# Altium PCB etapa_1_v2.PcbDoc (part 1 of 2)
Units mil, origin at the board's own origin, x right, y up, seen from the top; angles counter-clockwise.
Board outline 2047.24 x 2047.24 mil, 6 copper layers (Top Layer, Pot_Gnd, X, Y, Ground, Bottom Layer); 286 components, 155 nets, 796 pads, 177 vias.
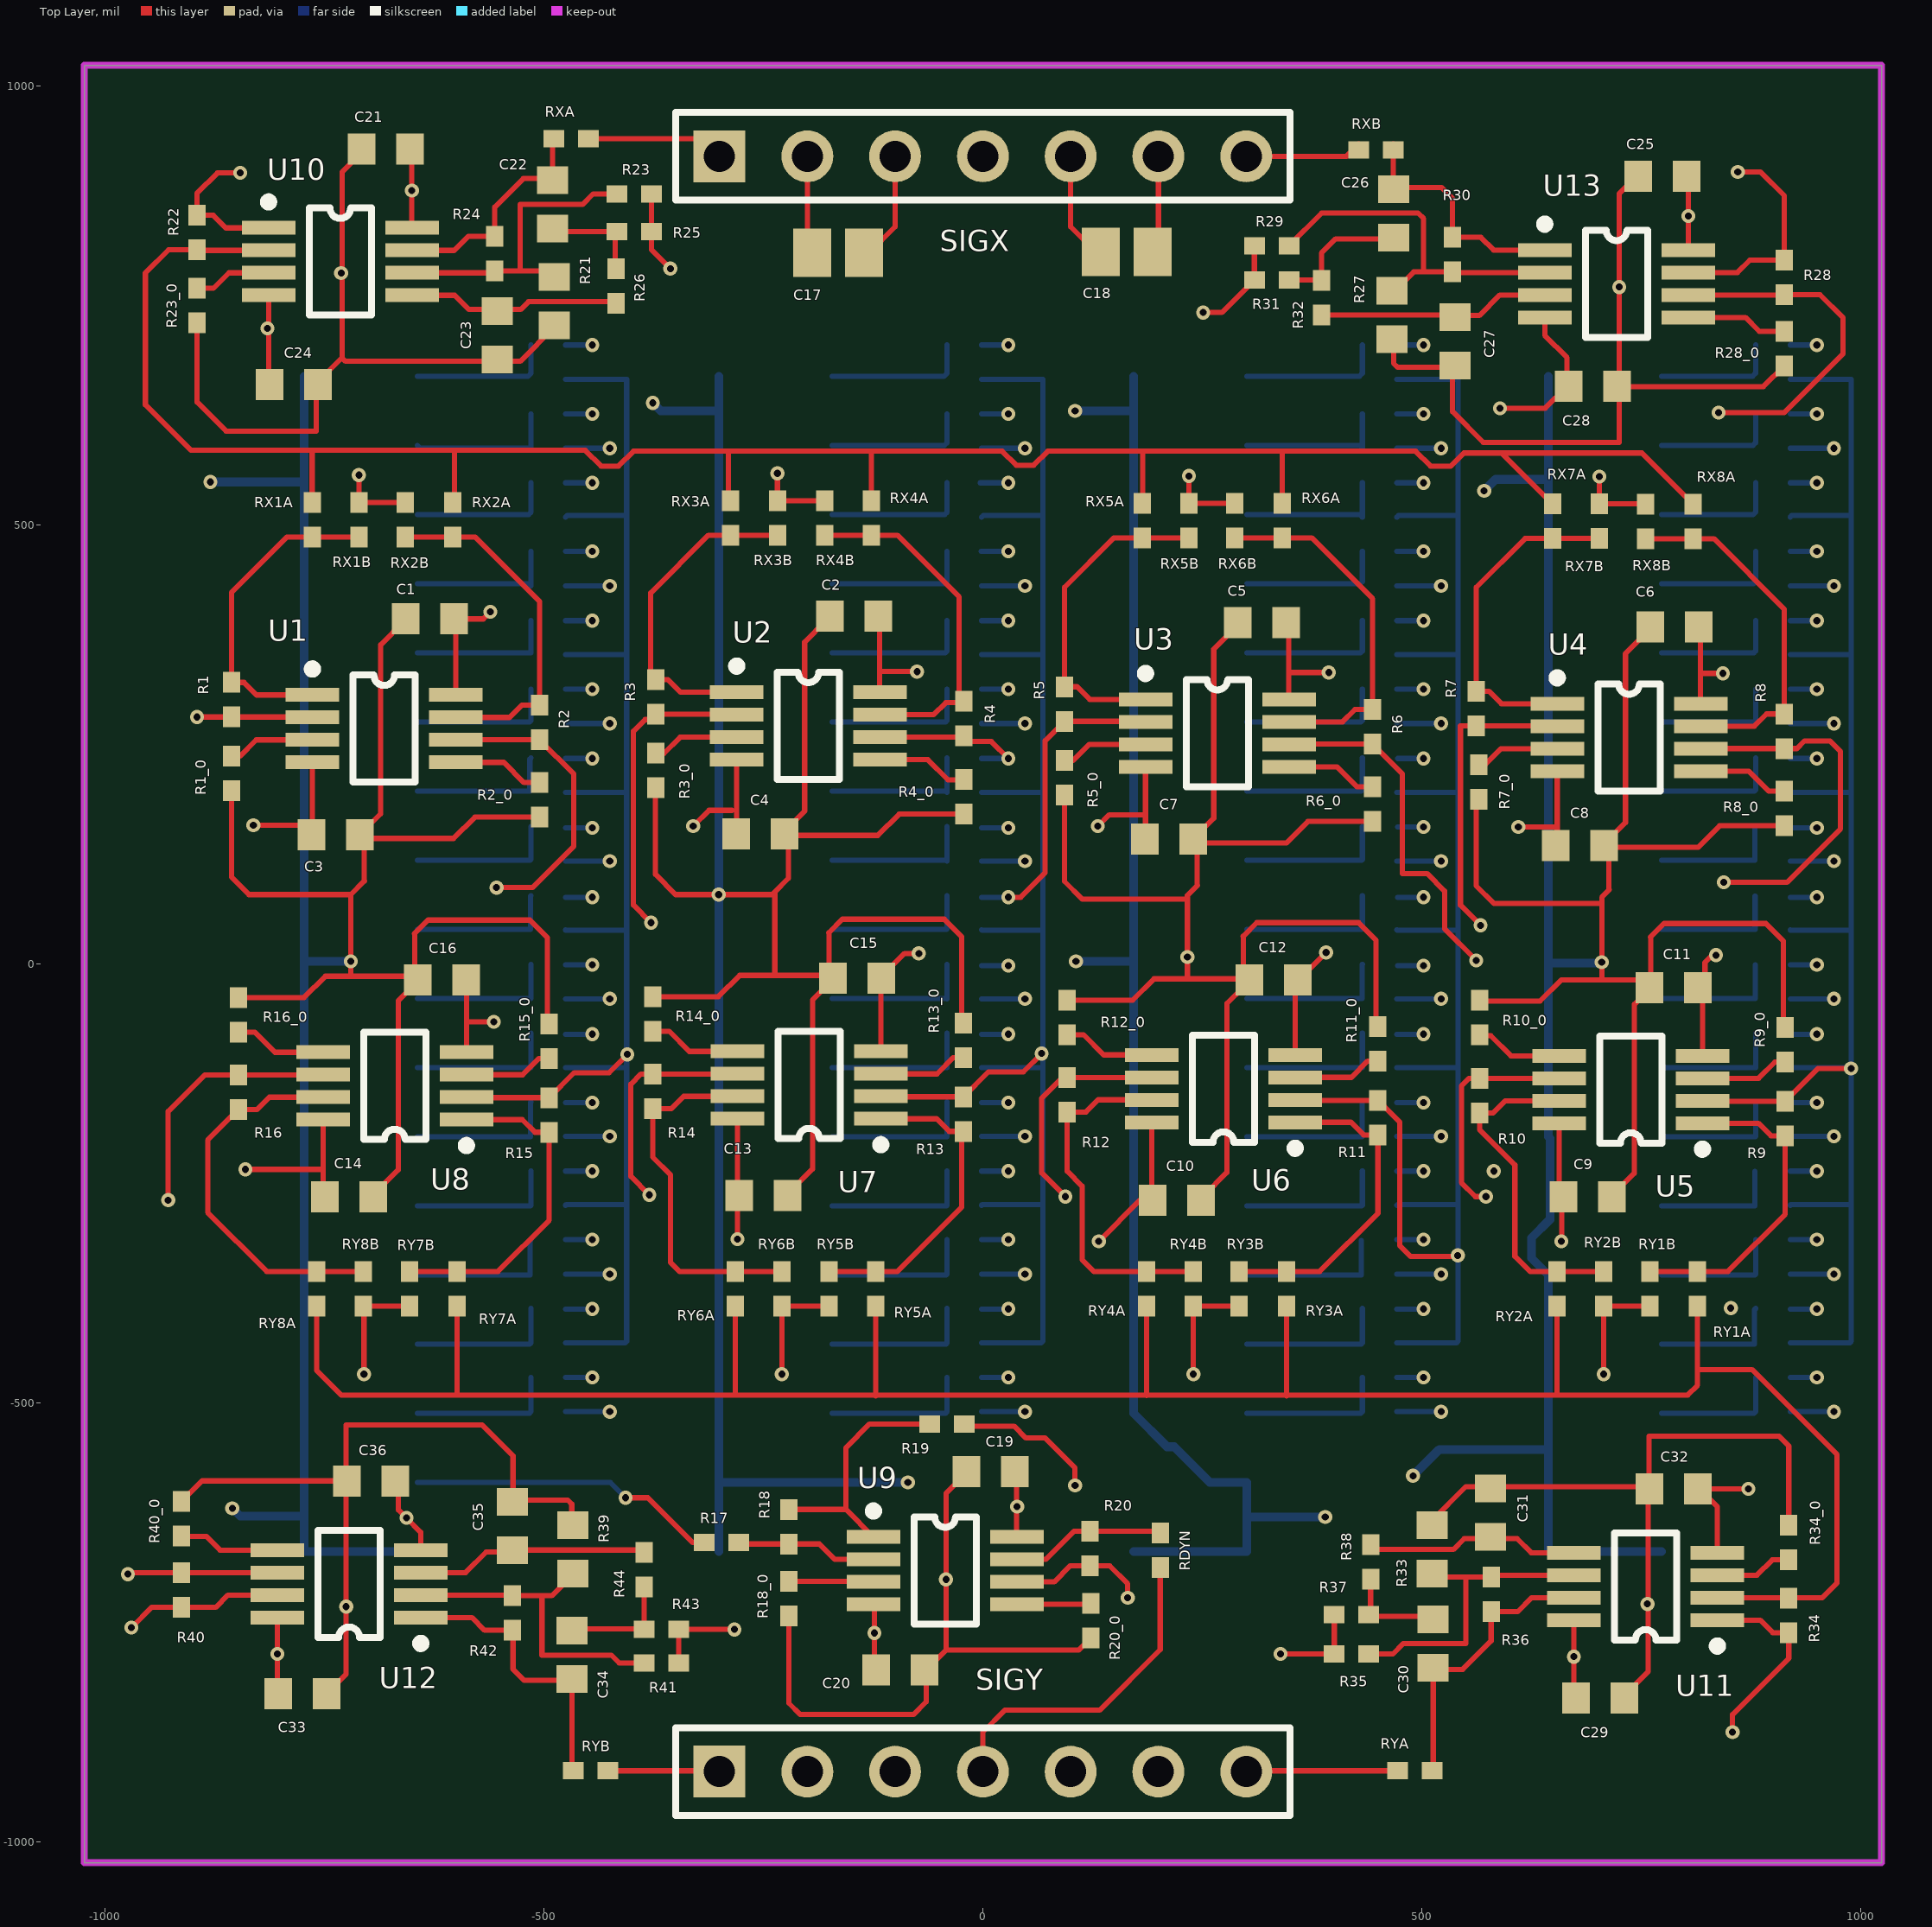
[diagram p0: Top Layer view]
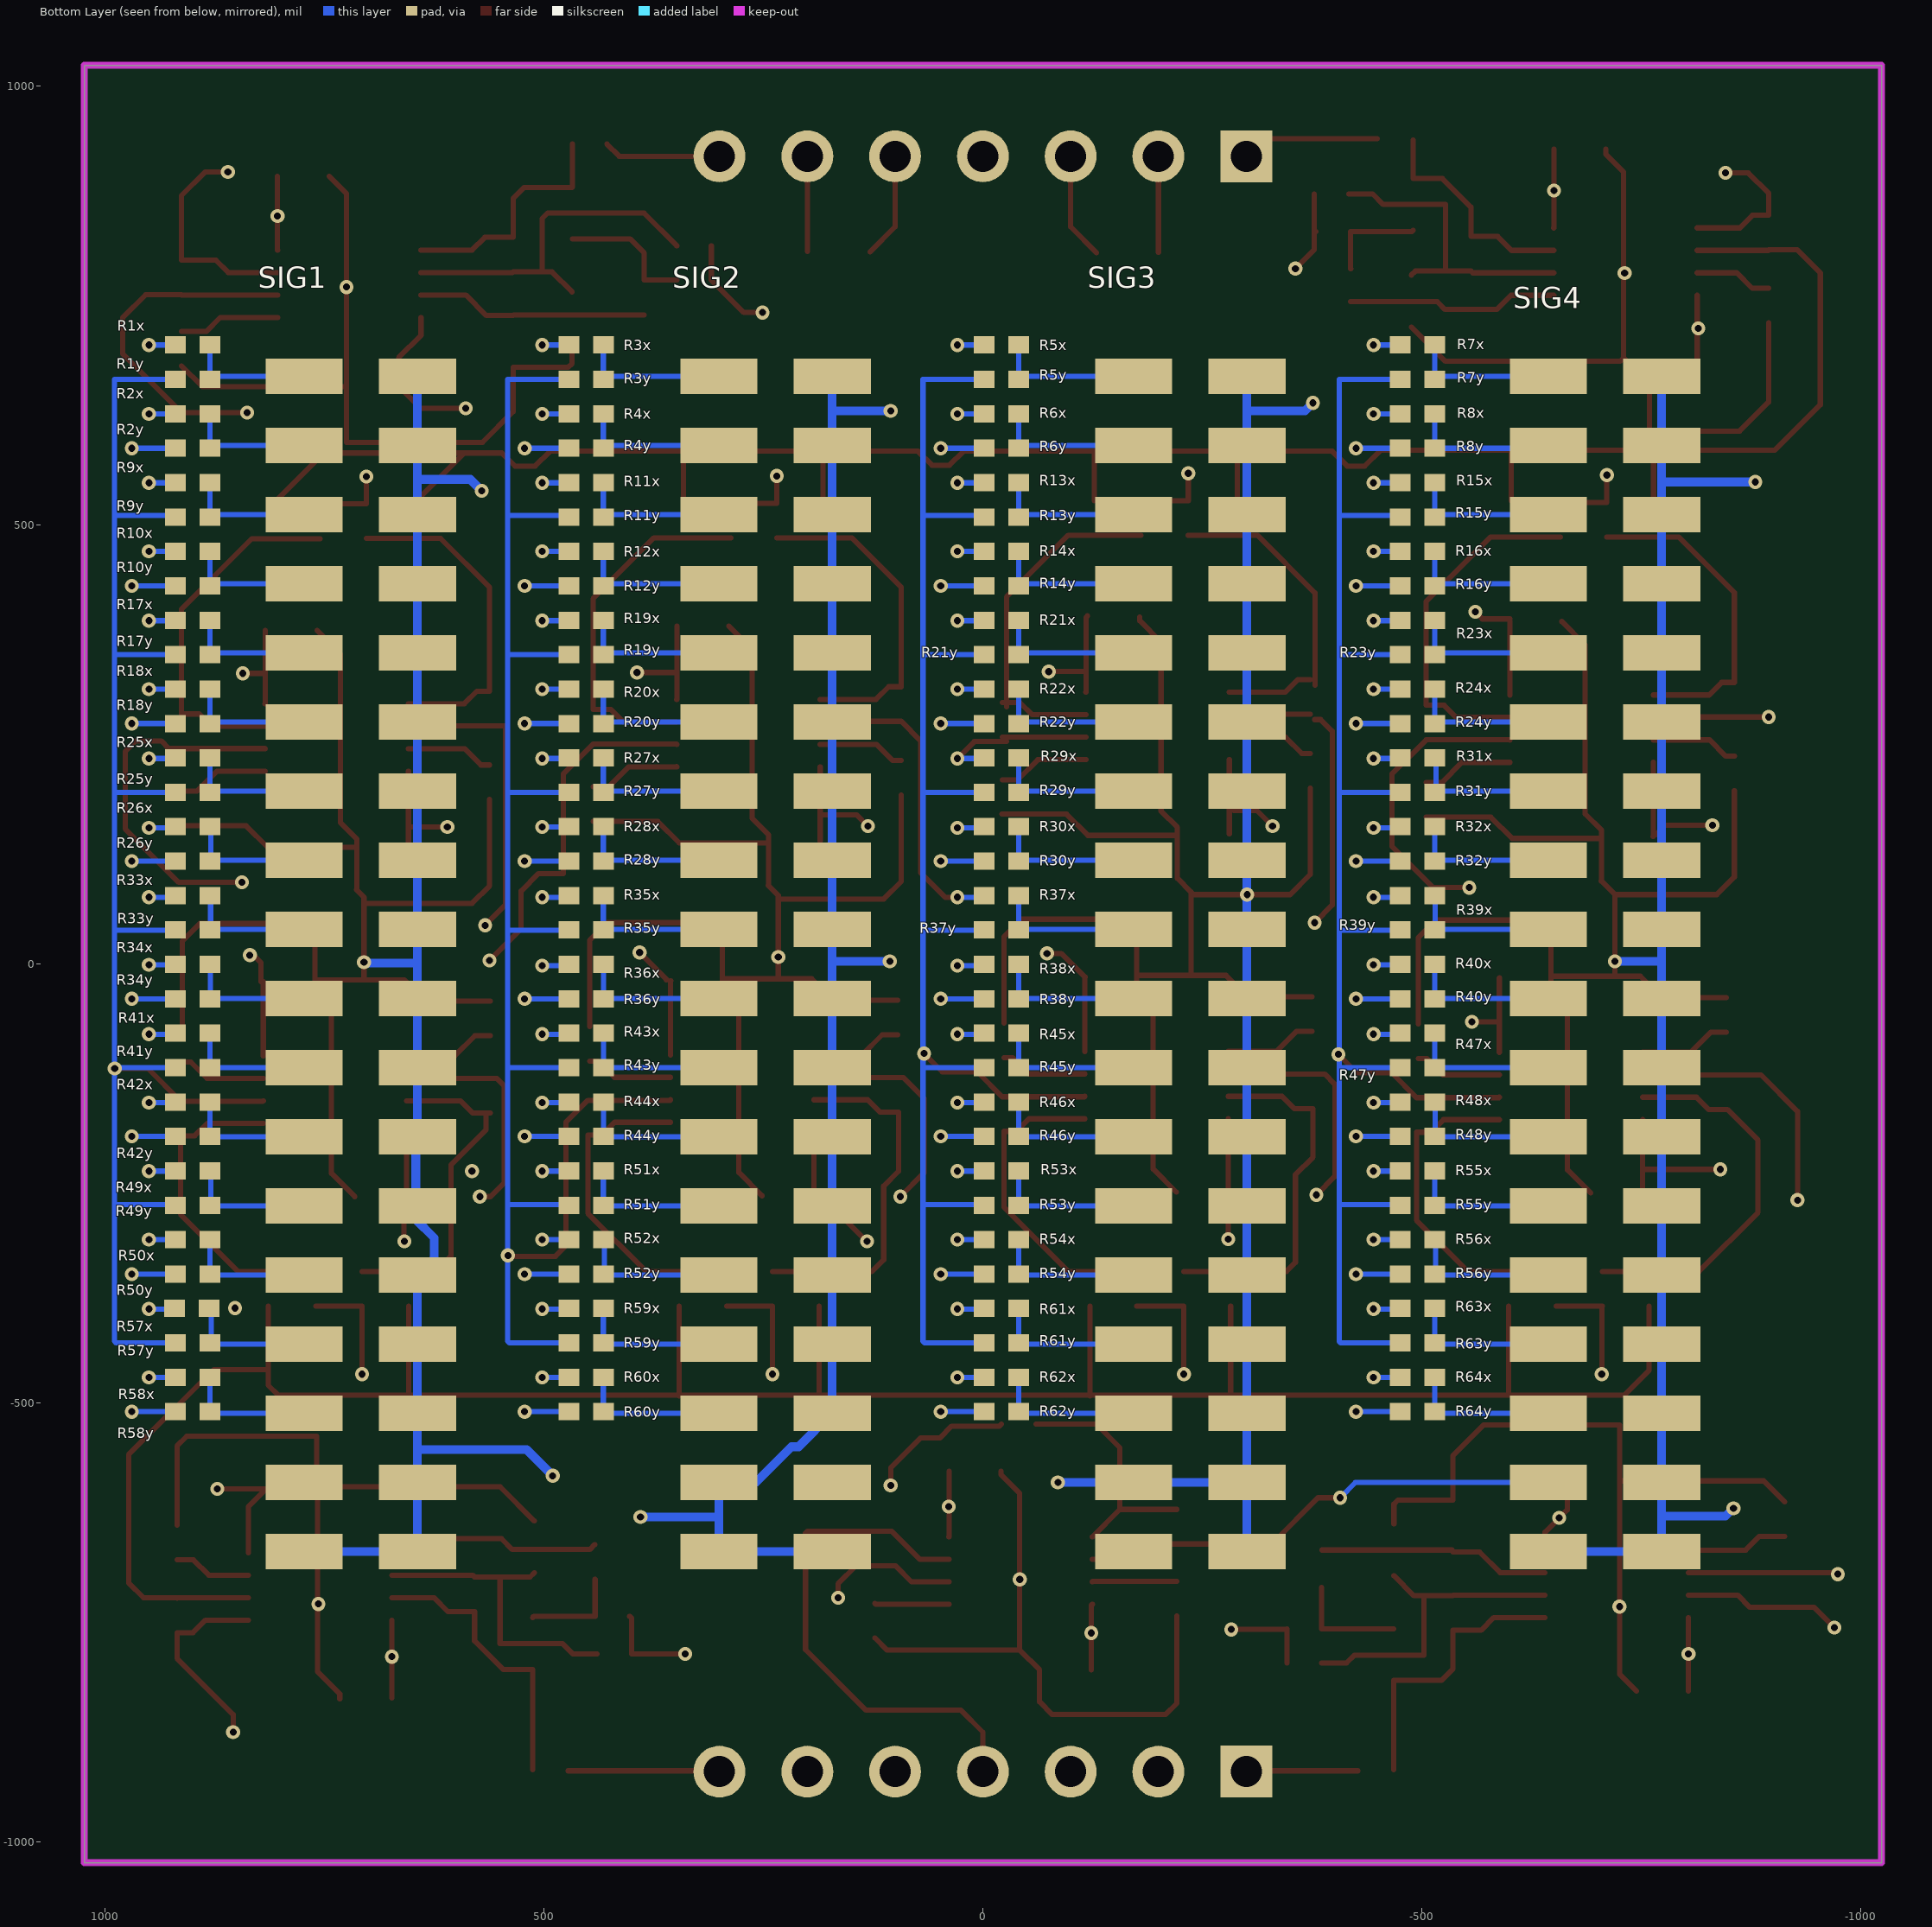
[diagram p1: Bottom Layer view, seen from below]
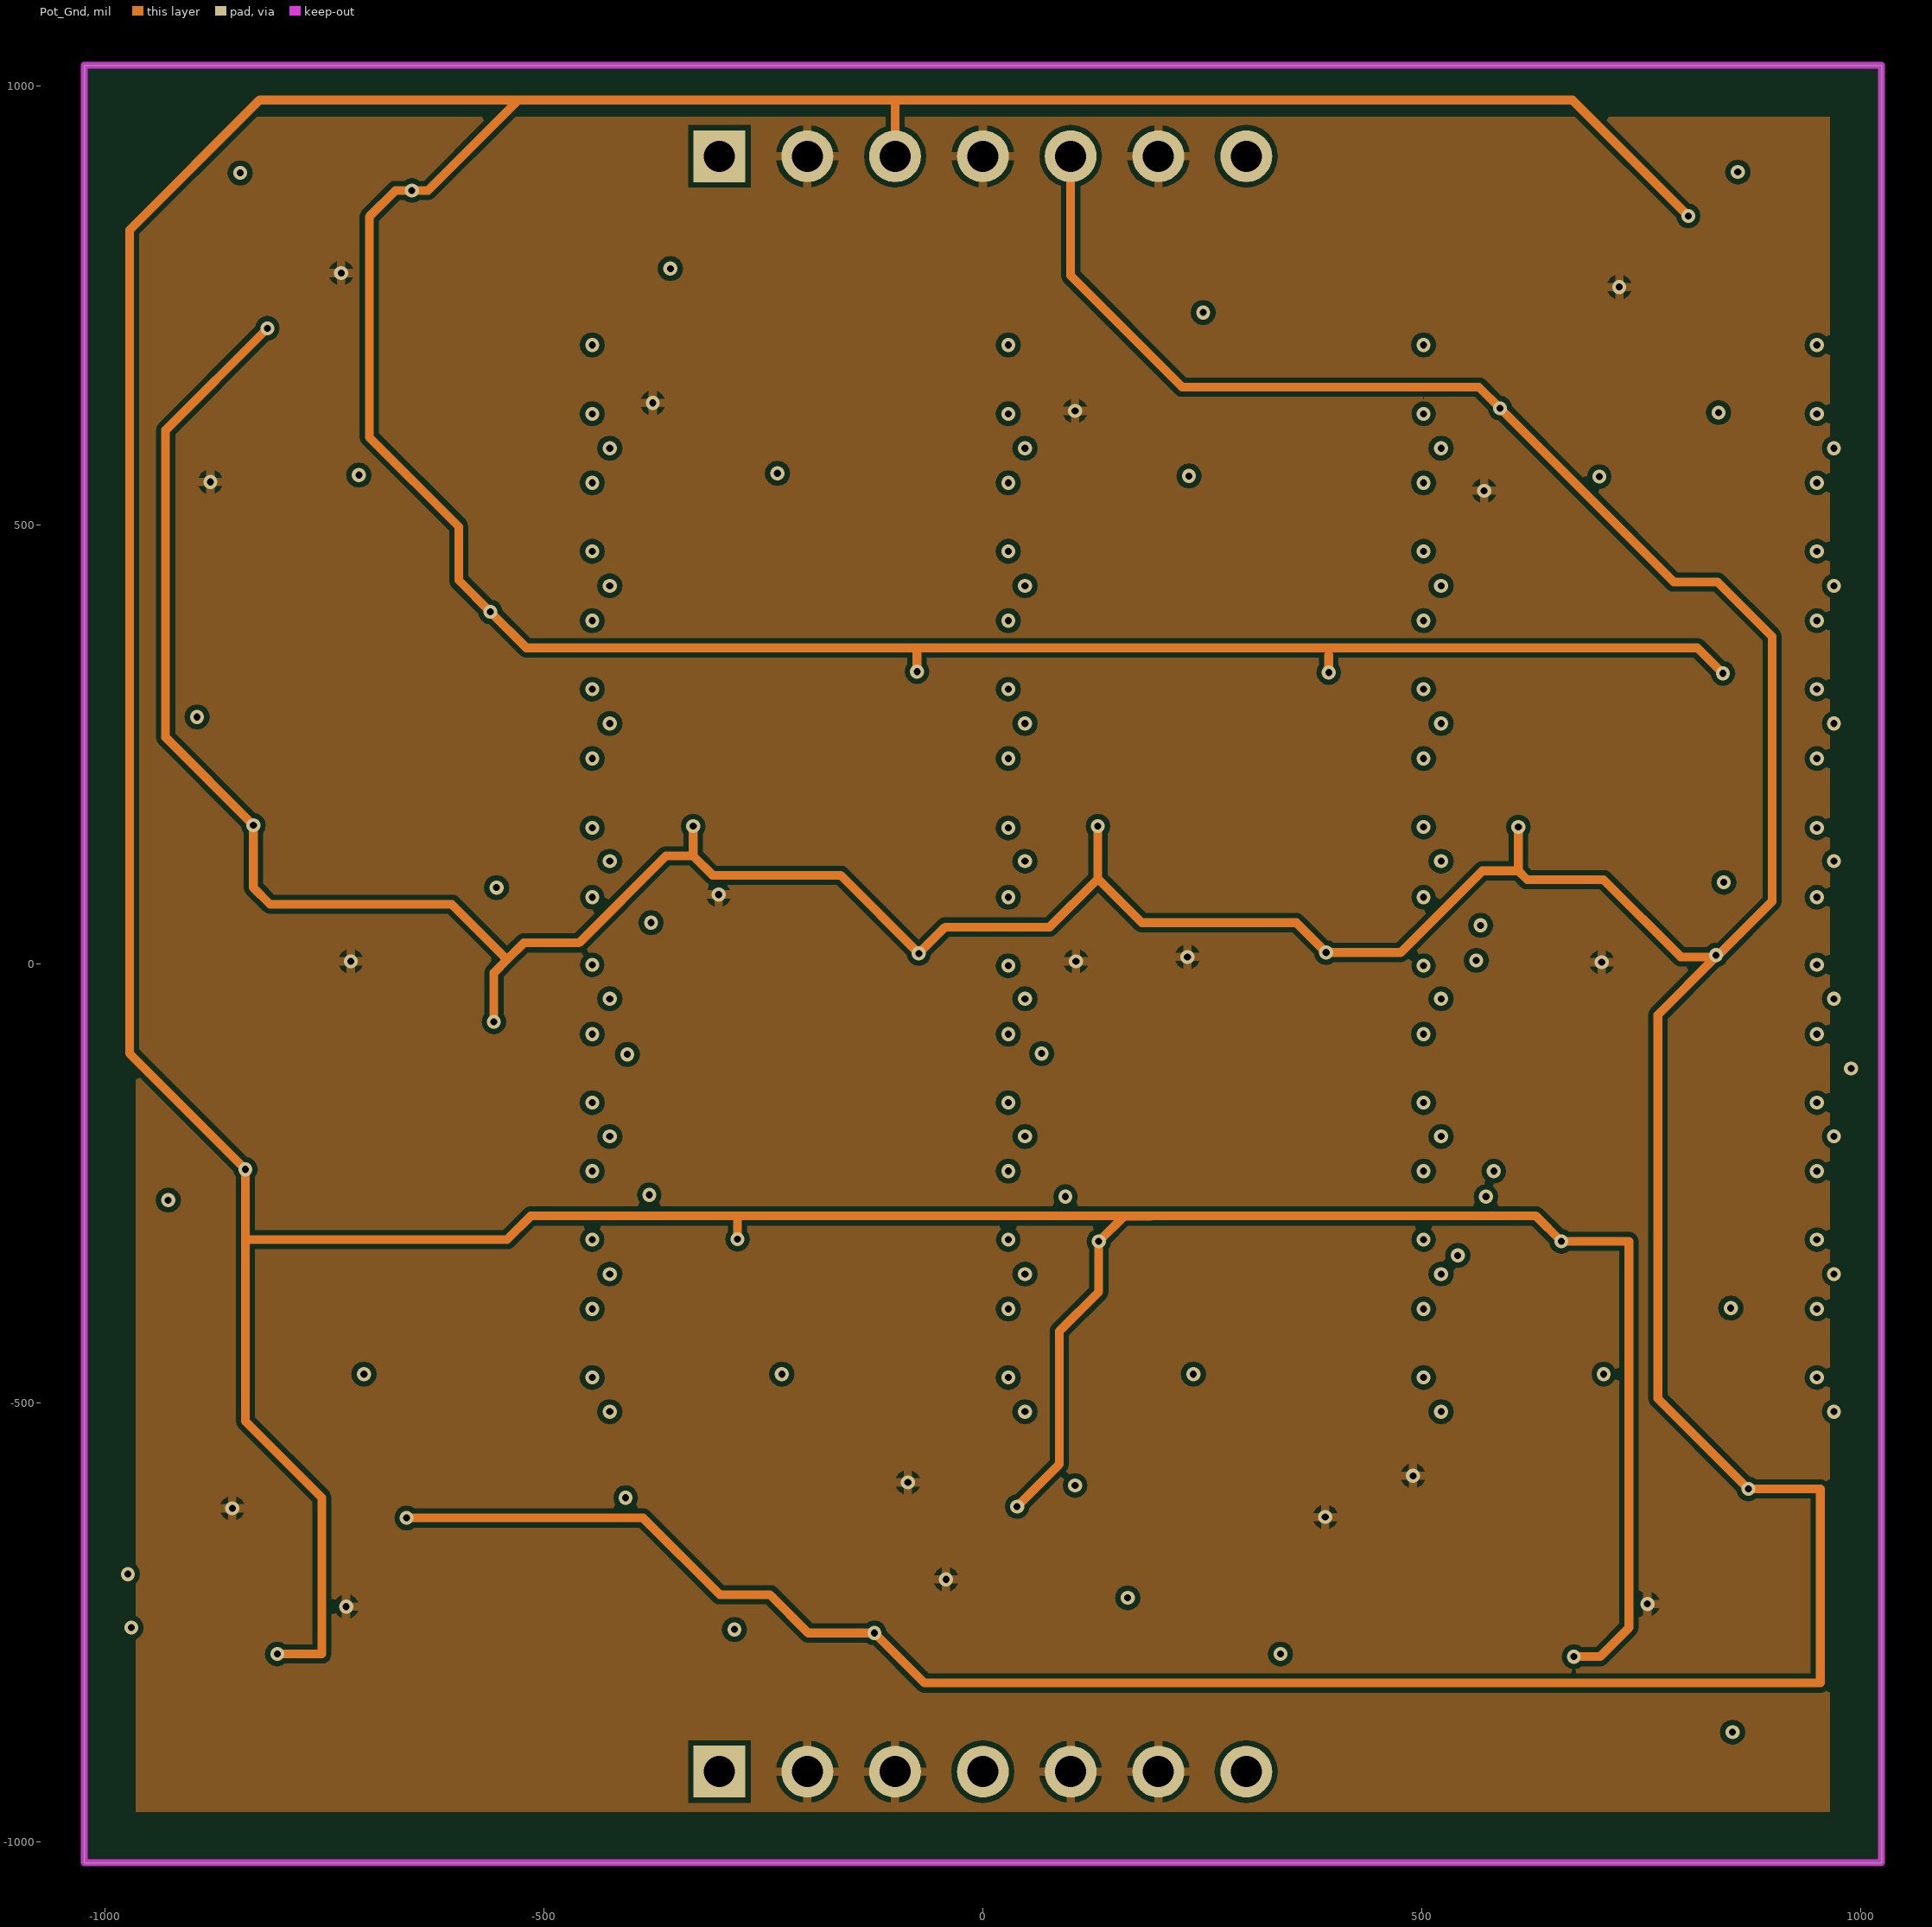
[diagram p2: Pot_Gnd]
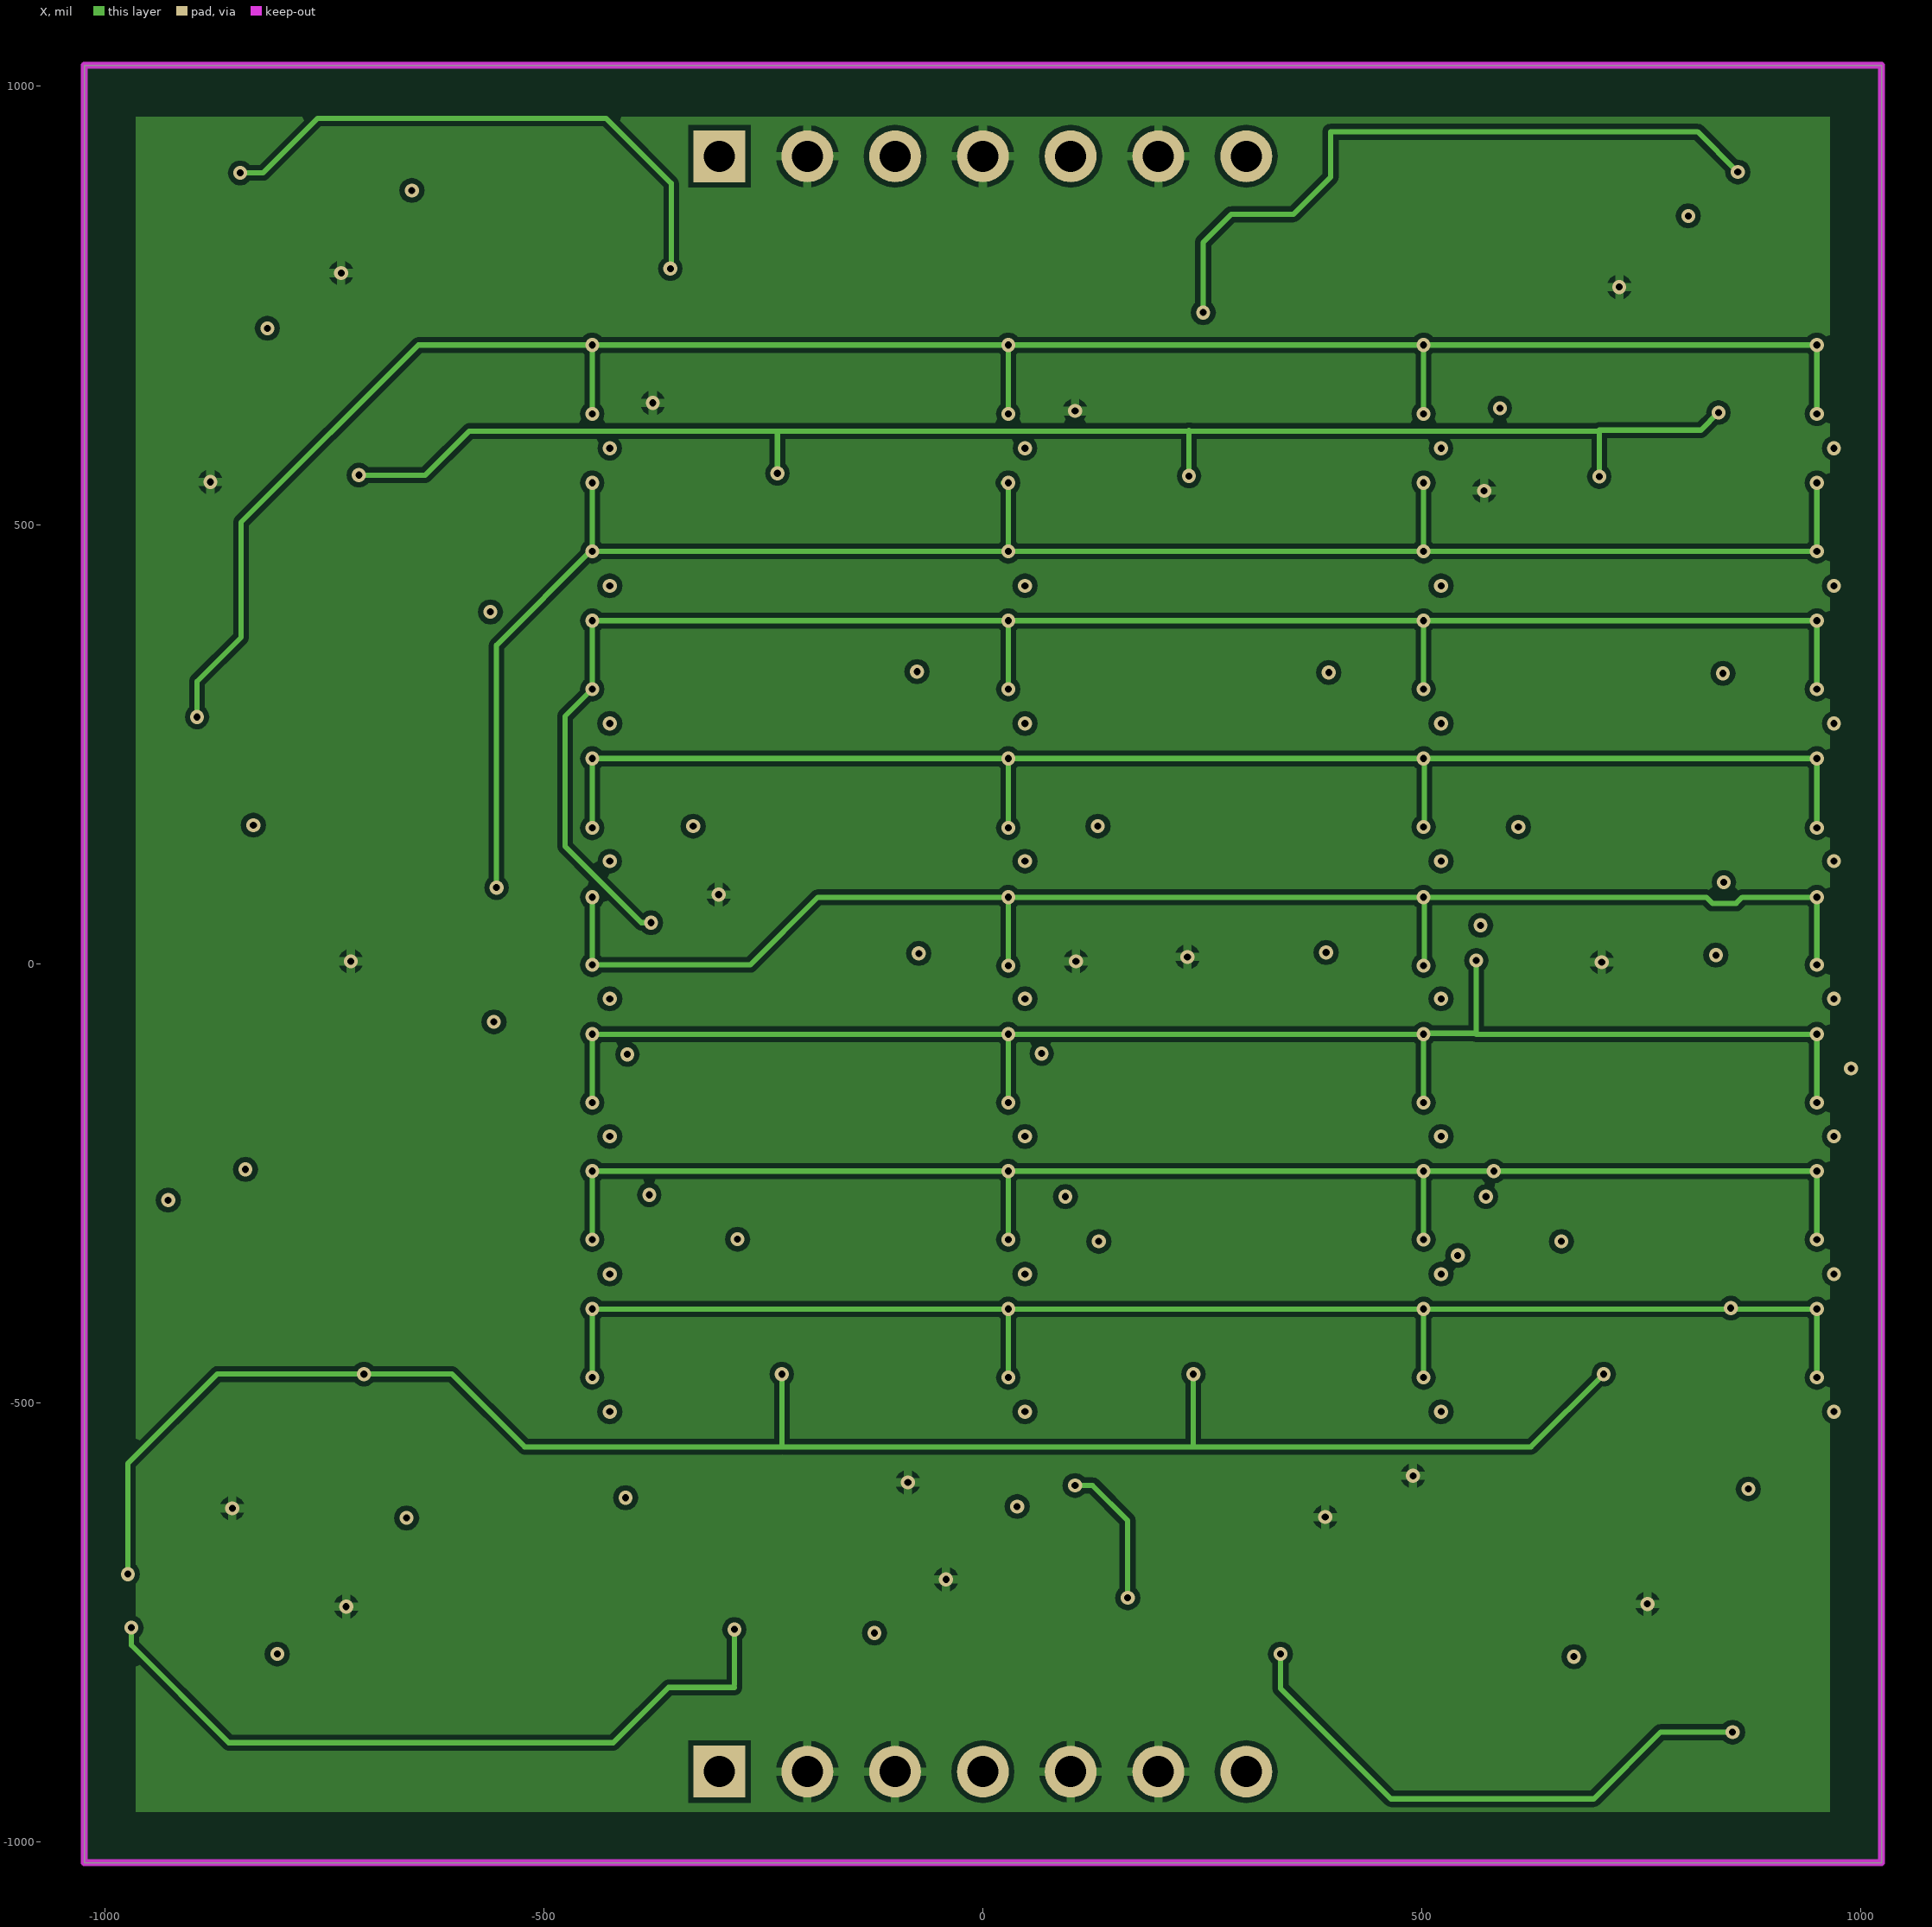
[diagram p3: X]
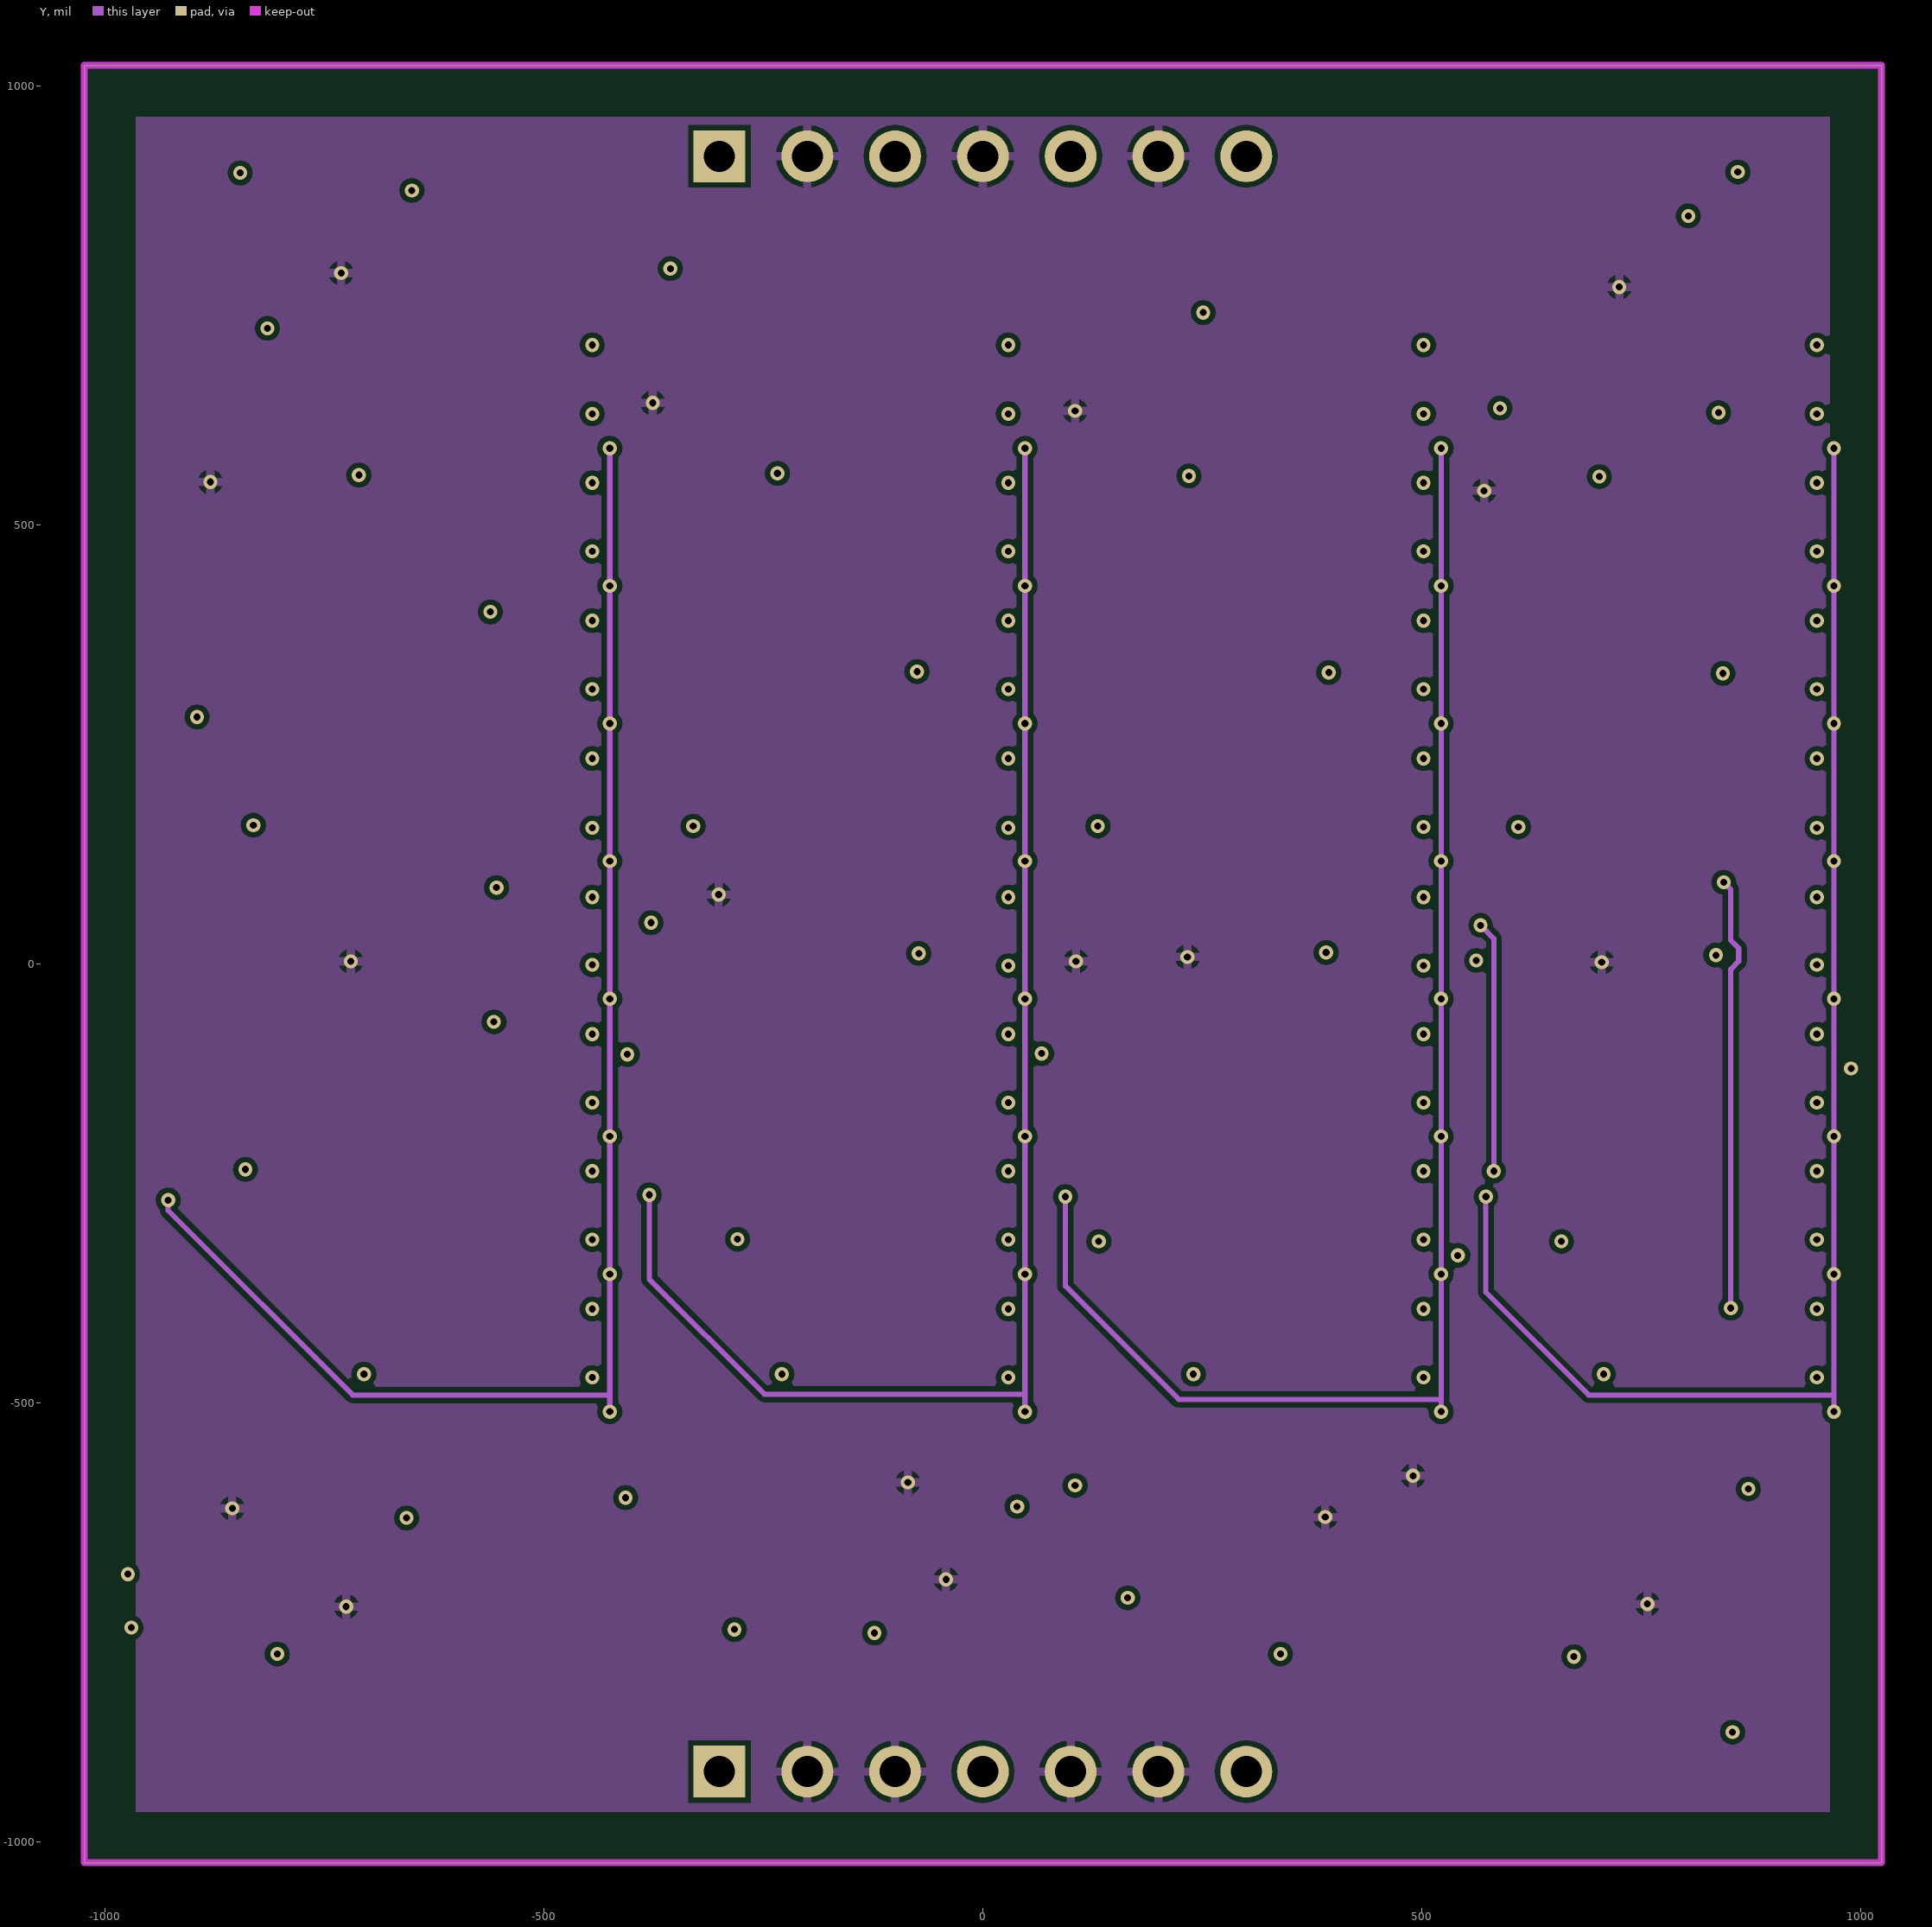
[diagram p4: Y]
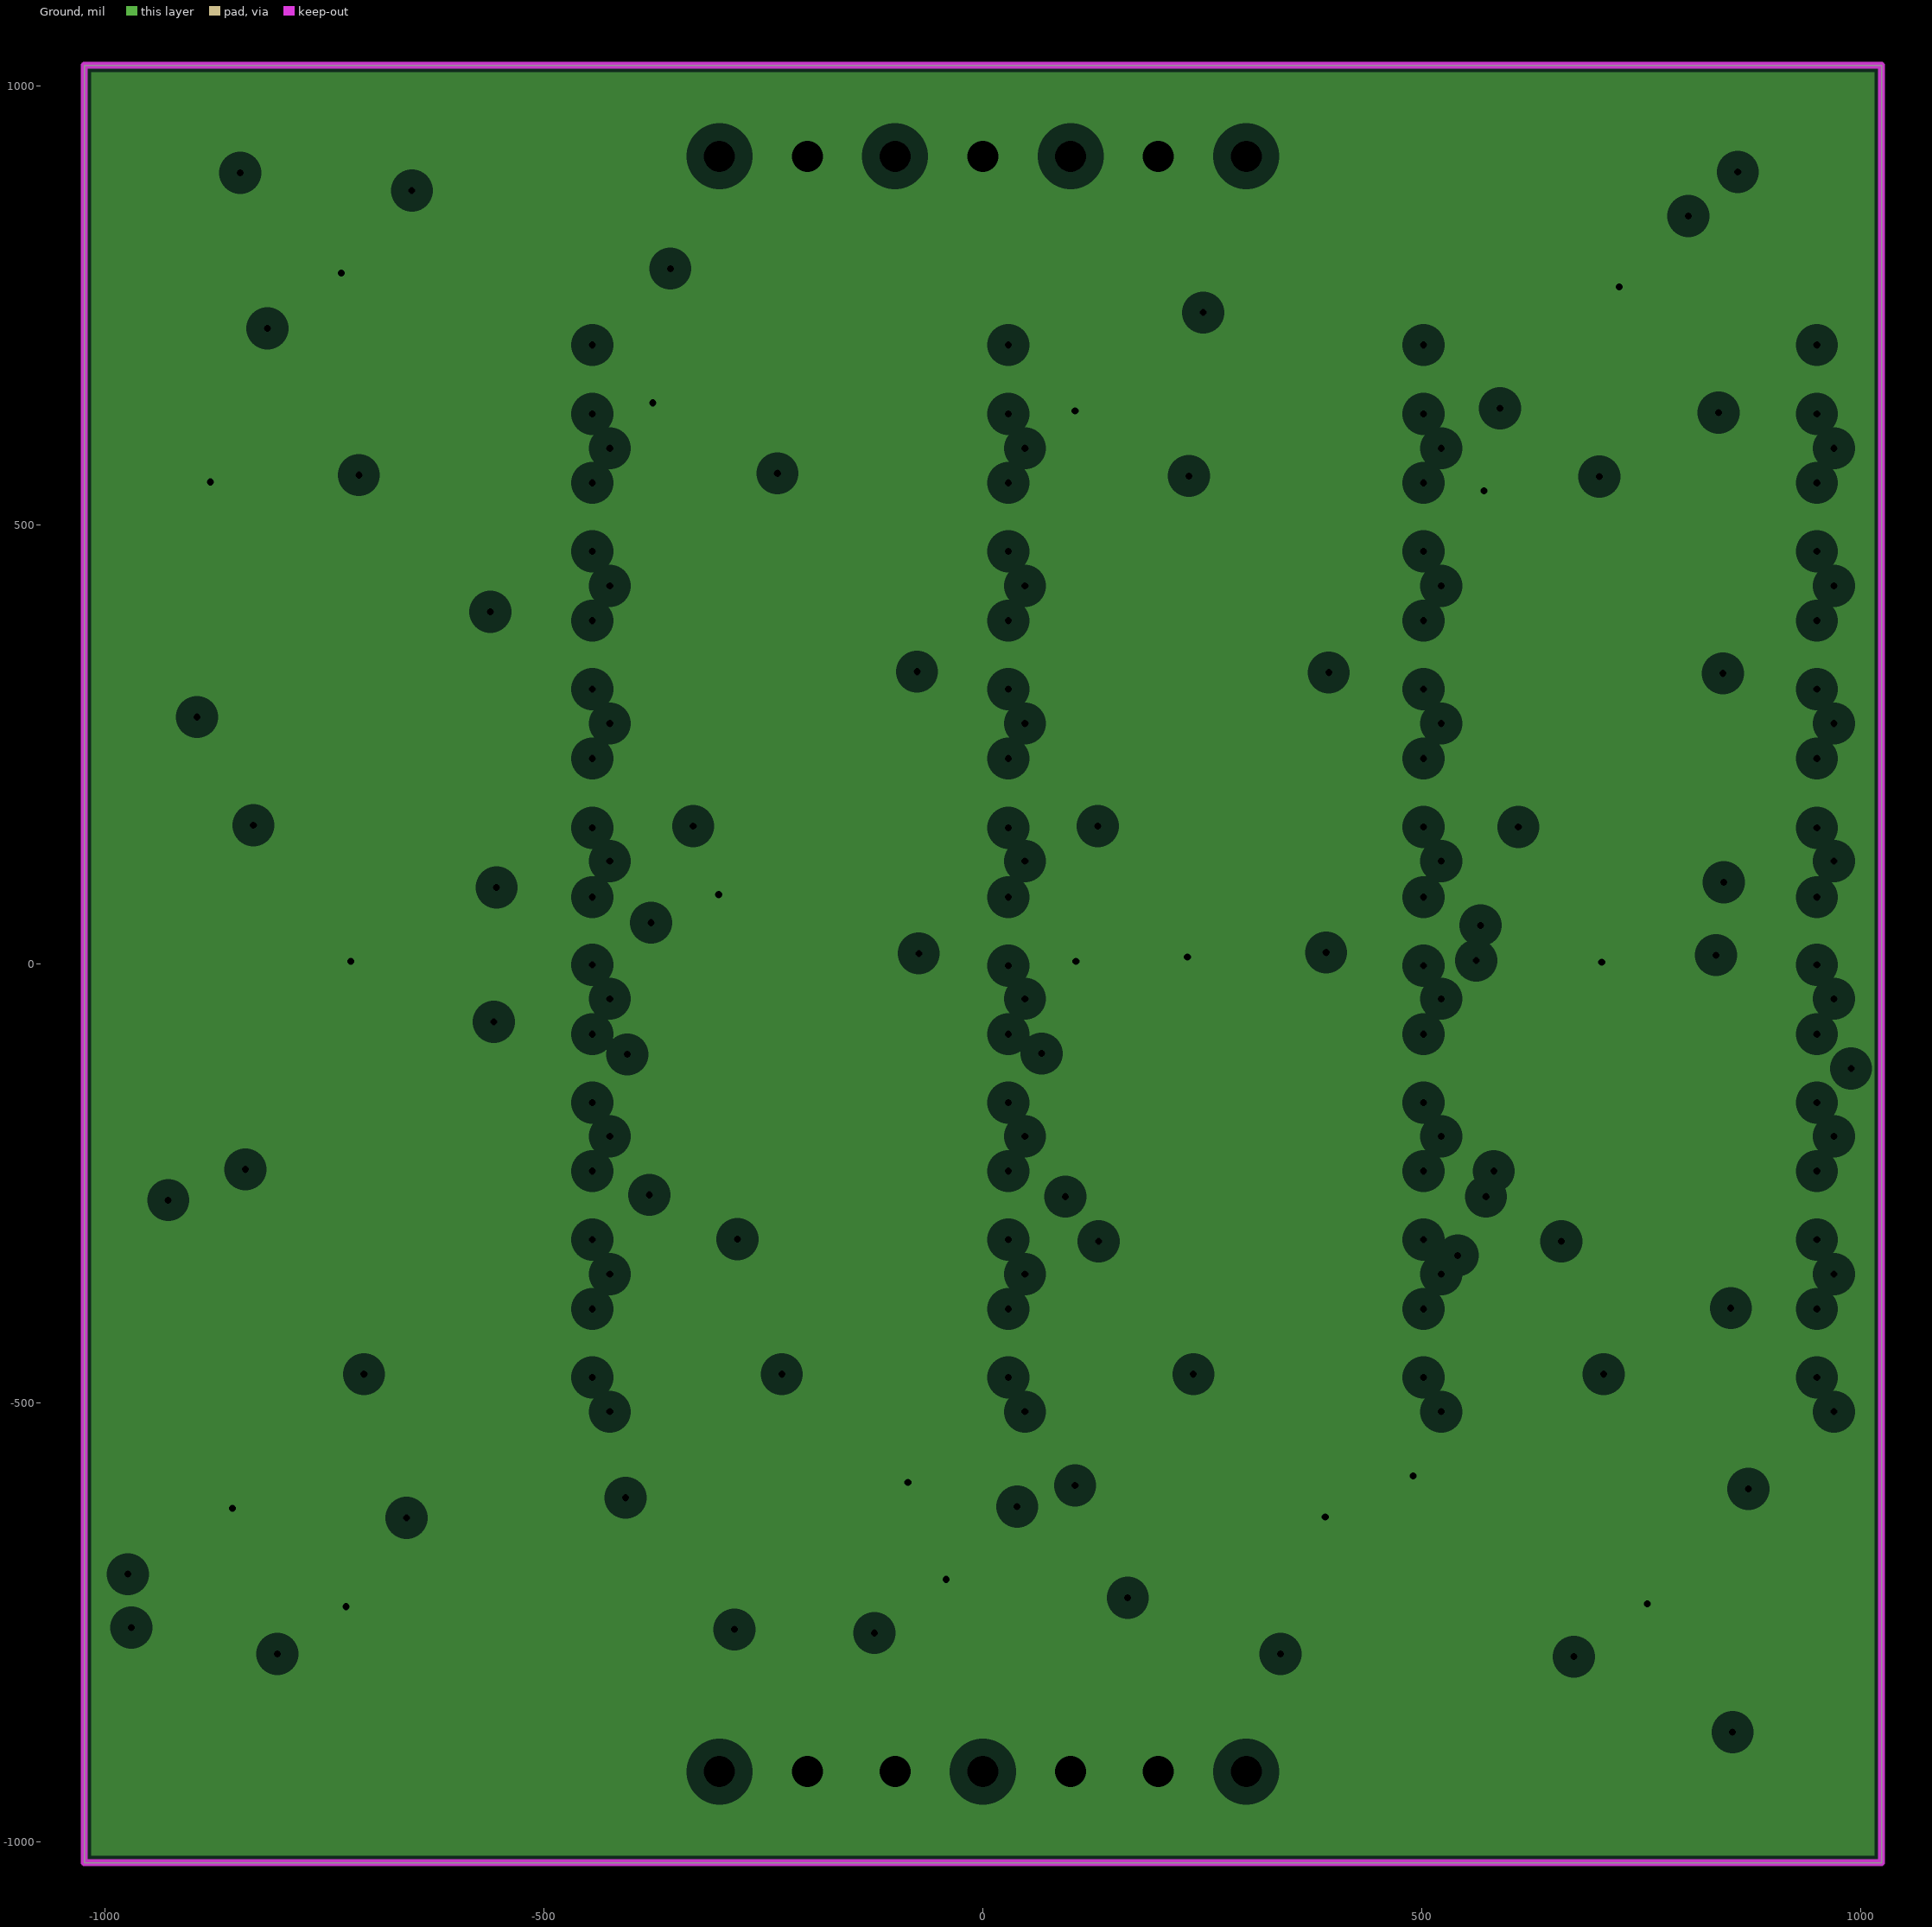
[diagram p5: Ground, clearances drawn from the general rule]

## Layer stack, top to bottom
Top Layer: signal copper 1.4
Dielectric: prepreg 12.6, FR-4, Dk 4.8
Pot_Gnd: signal copper 1.4
Dielectric: core 12.6, FR-4, Dk 4.8
X: signal copper 1.4
Dielectric: prepreg 12.6, FR-4, Dk 4.8
Y: signal copper 1.4
Dielectric: core 12.6, FR-4, Dk 4.8
Ground: plane copper 1.4, net GND
Dielectric: prepreg 12.6, FR-4, Dk 4.8
Bottom Layer: signal copper 1.4

## Board outline
-1023.62,1023.62 -1023.62,-1023.62 1023.62,-1023.62 1023.62,1023.62 -1023.62,1023.62

## Design rules (kind name [scope] priority, off if disabled: settings)
Clearance Clearance_1 [IsTrack vs IsVia OR IsPad] p1: gap=8
Clearance [All] p2: gap=6
MinimumSolderMaskSliver [All] p1: minsoldermaskwidth=5.5
PlaneClearance [All] p1: clearance=20
PlaneConnect PlaneConnect_1 [IsVia AND InNet('GND')] p1: planeconnectstyle=Direct reliefexpansion=20 reliefentries=4 reliefconductorwidth=10 reliefairgap=10
PlaneConnect [All] p2: planeconnectstyle=Relief reliefexpansion=20 reliefentries=4 reliefconductorwidth=10 reliefairgap=10
PolygonConnect [All] p1: connectstyle=Relief reliefconductorwidth=10 reliefentries=4 polygonreliefangle="90 Angle"
RoutingTopology [All] p1: topology=Daisy_Balanced
RoutingVias [All] p1: holewidth=8 width=16 viastyle="Through Hole" minholewidth=8 minwidth=16 maxholewidth=8 maxwidth=16
SilkscreenOverComponentPads [All] p1: minsilkscreentomaskgap=8
SolderMaskExpansion SolderMaskExpansion_2 [(InComponent('SIG1') OR InComponent('SIG2') OR InComponent('SIG3') OR InComponent('SIG4'))] p1: expansion=6
SolderMaskExpansion SolderMaskExpansion_1 [IsVia] p2: expansion=2
SolderMaskExpansion [All] p3: expansion=2
Width Width_1 [(InNet('GND') AND OnLayer('Bottom Layer'))] p1: maxlimit=15 minlimit=10 preferedwidth=12
Width [All] p2: maxlimit=15 minlimit=6 preferedwidth=6 toplayer_maxwidth=6 midlayer1_maxwidth=6 midlayer2_maxwidth=6 midlayer3_minwidth=10 midlayer3_prefwidth=12 bottomlayer_maxwidth=6 minimp=50.000000 maximp=50.000000 favimp=50.000000
23 further rules are at their usual default settings.

## Classes and differential pairs
component class etapa1_anger_Y: C19 C20 C29 C30 C31 C32 C33 C34 C35 C36 R17 R18 R18_0 R19 R20 R20_0 R33 R34 R34_0 R35 R36 R37 R38 R39 R40 R40_0 R41 R42 R43 R44 RDYN RY1A RY1B RY2A RY2B RY3A RY3B RY4A RY4B RY5A RY5B RY6A RY6B RY7A RY7B RY8A RY8B RYA RYB SIGY U9 U11 U12
component class etapa1_anger_X: C17 C18 C21 C22 C23 C24 C25 C26 C27 C28 R21 R22 R23 R23_0 R24 R25 R26 R27 R28 R28_0 R29 R30 R31 R32 RX1A RX1B RX2A RX2B RX3A RX3B RX4A RX4B RX5A RX5B RX6A RX6B RX7A RX7B RX8A RX8B RXA RXB SIGX U10 U13
component class etapa1_suma: C1 C2 C3 C4 C5 C6 C7 C8 C9 C10 C11 C12 C13 C14 C15 C16 R1 R1_0 R2 R2_0 R3 R3_0 R4 R4_0 R5 R5_0 R6 R6_0 R7 R7_0 R8 R8_0 R9 R9_0 R10 R10_0 R11 R11_0 R12 R12_0 R13 R13_0 R14 R14_0 R15 R15_0 R16 R16_0 U1 U2 U3 U4 U5 U6 U7 U8
component class etapa_1: R1x R1y R2x R2y R3x R3y R4x R4y R5x R5y R6x R6y R7x R7y R8x R8y R9x R9y R10x R10y R11x R11y R12x R12y R13x R13y R14x R14y R15x R15y R16x R16y R17x R17y R18x R18y R19x R19y R20x R20y R21x R21y R22x R22y R23x R23y R24x R24y R25x R25y R26x R26y R27x R27y R28x R28y R29x R29y R30x R30y R31x R31y R32x R32y R33x R33y R34x R34y R35x R35y R36x R36y R37x R37y R38x R38y R39x R39y R40x R40y R41x R41y R42x R42y R43x R43y R44x R44y R45x R45y R46x R46y R47x R47y R48x R48y R49x R49y R50x R50y R51x R51y R52x R52y R53x R53y R54x R54y R55x R55y R56x R56y R57x R57y R58x R58y R59x R59y R60x R60y R61x R61y R62x R62y R63x R63y R64x R64y SIG1 SIG2 SIG3 SIG4

## Components (designator, comment, footprint, x,y, rotation, side; value= is the part's Value field where it differs from the comment)
C1 "Cap" 1608[0603] -630,393 r0 top
C2 "Cap" 1608[0603] -146.69,396.39 r0 top
C3 "Cap" 1608[0603] -737,147 r180 top
C4 "Cap" 1608[0603] -253.69,148.39 r180 top
C5 "Cap" 1608[0603] 318,389 r0 top
C6 "Cap" 1608[0603] 788,384 r0 top
C7 "Cap" 1608[0603] 212,142 r180 top
C8 "Cap" 1608[0603] 680,135 r180 top
C9 "Cap" 1608[0603] 689,-265 r180 top
C10 "Cap" 1608[0603] 221,-269 r180 top
C11 "Cap" 1608[0603] 787,-27 r0 top
C12 "Cap" 1608[0603] 331,-18 r0 top
C13 "Cap" 1608[0603] -250,-264 r180 top
C14 "Cap" 1608[0603] -722,-265 r180 top
C15 "Cap" 1608[0603] -143,-16 r0 top
C16 "Cap" 1608[0603] -616,-18 r0 top
C17 "Cap Pol3" C0805 -165,810 r180 top
C18 "Cap Pol3" C0805 164,811 r180 top
C19 "Cap" 1608[0603] 9,-578 r0 top
C20 "Cap" 1608[0603] -94,-804 r180 top
C21 "Cap" 1608[0603] -680,928 r180 top
C22 "Cap" 1608[0603] -490,865 r90 top
C23 "Cap" 1608[0603] -553,716 r270 top
C24 "Cap" 1608[0603] -785,660 r180 top
C25 "Cap" 1608[0603] 774,897 r180 top
C26 "Cap" 1608[0603] 468,855 r90 top
C27 "Cap" 1608[0603] 538,709 r270 top
C28 "Cap" 1608[0603] 695,658 r180 top
C29 "Cap" 1608[0603] 703,-836 r0 top
C30 "Cap" 1608[0603] 513,-774 r270 top
C31 "Cap" 1608[0603] 578,-625 r90 top
C32 "Cap" 1608[0603] 787,-598 r0 top
C33 "Cap" 1608[0603] -775,-831 r0 top
C34 "Cap" 1608[0603] -468,-787 r270 top
C35 "Cap" 1608[0603] -536,-640 r90 top
C36 "Cap" 1608[0603] -697,-589 r0 top
R1 "Res3" 0402 -856,301 r90 top
R1_0 "Res3" 0402 -856,217 r270 top
R1x "Res3" 0402 900,705 r180 bottom
R1y "Res3" 0402 900,665.8 r0 bottom
R2 "Res3" 0402 -505,275 r90 top
R2_0 "Res3" 0402 -505,187 r90 top
R2x "Res3" 0402 900,626.61 r180 bottom
R2y "Res3" 0402 900,587.42 r180 bottom
R3 "Res3" 0402 -372.69,304.39 r90 top
R3_0 "Res3" 0402 -372.69,220.39 r90 top
R3x "Res3" 0402 452,705 r180 bottom
R3y "Res3" 0402 452,665.8 r180 bottom
R4 "Res3" 0402 -21.69,279.39 r90 top
R4_0 "Res3" 0402 -21.69,190.39 r90 top
R4x "Res3" 0402 452,626.61 r180 bottom
R4y "Res3" 0402 452,587.42 r180 bottom
R5 "Res3" 0402 93,296 r90 top
R5_0 "Res3" 0402 93,212 r90 top
R5x "Res3" 0402 -21,705 r180 bottom
R5y "Res3" 0402 -21,665.8 r180 bottom
R6 "Res3" 0402 444,270 r90 top
R6_0 "Res3" 0402 444,182 r90 top
R6x "Res3" 0402 -21,626.61 r180 bottom
R6y "Res3" 0402 -21,587.42 r180 bottom
R7 "Res3" 0402 562,291 r90 top
R7_0 "Res3" 0402 565,207 r90 top
R7x "Res3" 0402 -495,705 r180 bottom
R7y "Res3" 0402 -495,665.81 r180 bottom
R8 "Res3" 0402 913,265 r90 top
R8_0 "Res3" 0402 913,177 r90 top
R8x "Res3" 0402 -495,626.61 r180 bottom
R8y "Res3" 0402 -495,587.42 r180 bottom
R9 "Res3" 0402 914,-176 r270 top
R9_0 "Res3" 0402 914,-92 r270 top
R9x "Res3" 0402 900,548.22 r180 bottom
R9y "Res3" 0402 900,509.03 r180 bottom
R10 "Res3" 0402 566,-150 r270 top
R10_0 "Res3" 0402 566,-61 r270 top
R10x "Res3" 0402 900,469.84 r180 bottom
R10y "Res3" 0402 900,430.64 r180 bottom
R11 "Res3" 0402 450,-175 r270 top
R11_0 "Res3" 0402 450,-91 r270 top
R11x "Res3" 0402 452,548.22 r180 bottom
R11y "Res3" 0402 452,509.03 r180 bottom
R12 "Res3" 0402 96,-149 r270 top
R12_0 "Res3" 0402 96,-61 r270 top
R12x "Res3" 0402 452,469.84 r180 bottom
R12y "Res3" 0402 452,430.64 r180 bottom
R13 "Res3" 0402 -22,-171 r270 top
R13_0 "Res3" 0402 -22,-87 r270 top
R13x "Res3" 0402 -21,548.23 r180 bottom
R13y "Res3" 0402 -21,509.03 r180 bottom
R14 "Res3" 0402 -376,-145 r270 top
R14_0 "Res3" 0402 -376,-57 r270 top
R14x "Res3" 0402 -21,469.84 r180 bottom
R14y "Res3" 0402 -21,430.64 r180 bottom
R15 "Res3" 0402 -494,-172 r270 top
R15_0 "Res3" 0402 -494,-88 r270 top
R15x "Res3" 0402 -495,548.23 r180 bottom
R15y "Res3" 0402 -495,509.03 r180 bottom
R16 "Res3" 0402 -848,-146 r270 top
R16_0 "Res3" 0402 -848,-58 r270 top
R16x "Res3" 0402 -495,469.84 r180 bottom
R16y "Res3" 0402 -495,430.64 r180 bottom
R17 "Res3" 0402 -298,-659 r180 top
R17x "Res3" 0402 900,391.45 r180 bottom
R17y "Res3" 0402 900,352.26 r180 bottom
R18 "Res3" 0402 -221,-641 r90 top
R18_0 "Res3" 0402 -221,-723 r90 top
R18x "Res3" 0402 900,313.06 r180 bottom
R18y "Res3" 0402 900,273.87 r180 bottom
R19 "Res3" 0402 -41,-524 r0 top
R19x "Res3" 0402 452,391.45 r180 bottom
R19y "Res3" 0402 452,352.26 r180 bottom
R20 "Res3" 0402 122,-666 r90 top
R20_0 "Res3" 0402 123,-748 r90 top
R20x "Res3" 0402 452,313.06 r180 bottom
R20y "Res3" 0402 452,273.87 r180 bottom
R21 "Res3" 1608[0603] -488,755 r270 top
R21x "Res3" 0402 -21,391.45 r180 bottom
R21y "Res3" 0402 -21,352.26 r180 bottom
R22 "Res3" 0402 -895,833 r270 top
R22x "Res3" 0402 -21,313.06 r180 bottom
R22y "Res3" 0402 -21,273.87 r180 bottom
R23 "Res3" 0402 -397,877 r0 top
R23_0 "Res3" 0402 -895,750 r270 top
R23x "Res3" 0402 -495,391.45 r180 bottom
R23y "Res3" 0402 -495,352.26 r180 bottom
R24 "Res3" 0402 -556,809 r270 top
R24x "Res3" 0402 -495,313.06 r180 bottom
R24y "Res3" 0402 -495,273.87 r180 bottom
R25 "Res3" 0402 -397,834 r0 top
R25x "Res3" 0402 900,234.68 r180 bottom
R25y "Res3" 0402 900,195.48 r180 bottom
R26 "Res3" 0402 -418,772 r90 top
R26x "Res3" 0402 900,156.29 r180 bottom
R26y "Res3" 0402 900,117.1 r180 bottom
R27 "Res3" 1608[0603] 466,739.32 r270 top
R27x "Res3" 0402 452,234.68 r180 bottom
R27y "Res3" 0402 452,195.48 r180 bottom
R28 "Res3" 0402 913,782 r270 top
R28_0 "Res3" 0402 913,701 r270 top
R28x "Res3" 0402 452,156.29 r180 bottom
R28y "Res3" 0402 452,117.1 r180 bottom
R29 "Res3" 0402 329,818 r180 top
R29x "Res3" 0402 -21,234.68 r180 bottom
R29y "Res3" 0402 -21,195.48 r180 bottom
R30 "Res3" 0402 535,808 r270 top
R30x "Res3" 0402 -21,156.29 r180 bottom
R30y "Res3" 0402 -21,117.1 r180 bottom
R31 "Res3" 0402 329,779 r180 top
R31x "Res3" 0402 -495,234.68 r180 bottom
R31y "Res3" 0402 -495,195.48 r180 bottom
R32 "Res3" 0402 386,759 r90 top
R32x "Res3" 0402 -495,156.29 r180 bottom
R32y "Res3" 0402 -495,117.1 r180 bottom
R33 "Res3" 1608[0603] 512,-667 r90 top
R33x "Res3" 0402 900,77.9 r180 bottom
R33y "Res3" 0402 900,38.71 r180 bottom
R34 "Res3" 0402 918,-742 r90 top
R34_0 "Res3" 0402 918,-659 r90 top
R34x "Res3" 0402 900,-0.49 r180 bottom
R34y "Res3" 0402 900,-39.68 r180 bottom
R35 "Res3" 0402 420,-786 r180 top
R35x "Res3" 0402 452,77.9 r180 bottom
R35y "Res3" 0402 452,38.71 r180 bottom
R36 "Res3" 0402 579,-718 r90 top
R36x "Res3" 0402 452,-0.49 r180 bottom
R36y "Res3" 0402 452,-39.68 r180 bottom
R37 "Res3" 0402 420,-741 r180 top
R37x "Res3" 0402 -21,77.9 r180 bottom
R37y "Res3" 0402 -21,38.71 r180 bottom
R38 "Res3" 0402 442,-681 r270 top
R38x "Res3" 0402 -21,-0.49 r180 bottom
R38y "Res3" 0402 -21,-39.68 r180 bottom
R39 "Res3" 1608[0603] -467,-667 r90 top
R39x "Res3" 0402 -495,77.9 r180 bottom
R39y "Res3" 0402 -495,38.71 r180 bottom
R40 "Res3" 0402 -913,-713 r90 top
R40_0 "Res3" 0402 -913,-632 r90 top
R40x "Res3" 0402 -495,-0.49 r180 bottom
R40y "Res3" 0402 -495,-39.68 r180 bottom
R41 "Res3" 0402 -366,-796 r0 top
R41x "Res3" 0402 900,-78.87 r180 bottom
R41y "Res3" 0402 900,-118.07 r180 bottom
R42 "Res3" 0402 -536,-739 r90 top
R42x "Res3" 0402 900,-157.26 r180 bottom
R42y "Res3" 0402 900,-196.45 r180 bottom
R43 "Res3" 0402 -366,-758 r0 top
R43x "Res3" 0402 452,-78.87 r180 bottom
R43y "Res3" 0402 452,-118.07 r180 bottom
R44 "Res3" 0402 -386,-690 r270 top
R44x "Res3" 0402 452,-157.26 r180 bottom
R44y "Res3" 0402 452,-196.45 r180 bottom
R45x "Res3" 0402 -21,-78.87 r180 bottom
R45y "Res3" 0402 -21,-118.06 r180 bottom
R46x "Res3" 0402 -21,-157.26 r180 bottom
R46y "Res3" 0402 -21,-196.45 r180 bottom
R47x "Res3" 0402 -495,-78.87 r180 bottom
R47y "Res3" 0402 -495,-118.07 r180 bottom
R48x "Res3" 0402 -495,-157.26 r180 bottom
R48y "Res3" 0402 -495,-196.45 r180 bottom
R49x "Res3" 0402 900,-235.65 r180 bottom
R49y "Res3" 0402 900,-274.84 r180 bottom
R50x "Res3" 0402 900,-314.03 r180 bottom
R50y "Res3" 0402 900,-353.23 r180 bottom
R51x "Res3" 0402 452,-235.65 r180 bottom
R51y "Res3" 0402 452,-274.84 r180 bottom
R52x "Res3" 0402 452,-314.03 r180 bottom
R52y "Res3" 0402 452,-353.23 r180 bottom
R53x "Res3" 0402 -21,-235.65 r180 bottom
R53y "Res3" 0402 -21,-274.84 r180 bottom
R54x "Res3" 0402 -21,-314.03 r180 bottom
R54y "Res3" 0402 -21,-353.23 r180 bottom
R55x "Res3" 0402 -495,-235.65 r180 bottom
R55y "Res3" 0402 -495,-274.84 r180 bottom
R56x "Res3" 0402 -495,-314.03 r180 bottom
R56y "Res3" 0402 -495,-353.23 r180 bottom
R57x "Res3" 0402 901,-392 r180 bottom
R57y "Res3" 0402 900,-431.61 r180 bottom
R58x "Res3" 0402 900,-470.81 r180 bottom
R58y "Res3" 0402 900,-510 r180 bottom
R59x "Res3" 0402 452,-392.42 r180 bottom
R59y "Res3" 0402 452,-431.61 r180 bottom
R60x "Res3" 0402 452,-470.81 r180 bottom
R60y "Res3" 0402 452,-510 r180 bottom
R61x "Res3" 0402 -21,-392.42 r180 bottom
R61y "Res3" 0402 -21,-431.61 r180 bottom
R62x "Res3" 0402 -21,-470.81 r180 bottom
R62y "Res3" 0402 -21,-510 r180 bottom
R63x "Res3" 0402 -495,-392.42 r180 bottom
R63y "Res3" 0402 -495,-431.62 r180 bottom
R64x "Res3" 0402 -495,-470.81 r180 bottom
R64y "Res3" 0402 -495,-510 r180 bottom
RDYN "Res3" 0402 202,-668 r90 top
RX1A "Res3" 0402 -764,506 r270 top
RX1B "Res3" 0402 -710.8,506 r270 top
RX2A "Res3" 0402 -604,506 r270 top
RX2B "Res3" 0402 -658,506 r270 top
RX3A "Res3" 0402 -287.2,508 r270 top
RX3B "Res3" 0402 -234,508 r270 top
RX4A "Res3" 0402 -127,508 r270 top
RX4B "Res3" 0402 -180,508 r270 top
RX5A "Res3" 0402 181.6,505 r270 top
RX5B "Res3" 0402 234.8,505 r270 top
RX6A "Res3" 0402 341,505 r270 top
RX6B "Res3" 0402 287,505 r270 top
RX7A "Res3" 0402 649,504.32 r270 top
RX7B "Res3" 0402 702.2,504.32 r270 top
RX8A "Res3" 0402 809,504 r270 top
RX8B "Res3" 0402 755,504 r270 top
RXA "Res3" 0402 -469,940 r180 top
RXB "Res3" 0402 448,927 r0 top
RY1A "Res3" 0402 814,-370 r90 top
RY1B "Res3" 0402 760,-370 r90 top
RY2A "Res3" 0402 654,-370 r90 top
RY2B "Res3" 0402 707.2,-370 r90 top
RY3A "Res3" 0402 346,-370 r90 top
RY3B "Res3" 0402 292,-370 r90 top
RY4A "Res3" 0402 186.6,-370 r90 top
RY4B "Res3" 0402 239.8,-370 r90 top
RY5A "Res3" 0402 -122,-370 r90 top
RY5B "Res3" 0402 -175,-370 r90 top
RY6A "Res3" 0402 -282.2,-370 r90 top
RY6B "Res3" 0402 -229,-370 r90 top
RY7A "Res3" 0402 -599,-370 r90 top
RY7B "Res3" 0402 -653,-370 r90 top
RY8A "Res3" 0402 -759,-370 r90 top
RY8B "Res3" 0402 -705.8,-370 r90 top
RYA "Res3" 0402 492,-919 r0 top
RYB "Res3" 0402 -447,-919 r180 top
SIG1 "Con_Hamamatsu" SQW-118-2 708.66,0 r270 bottom locked
SIG2 "Con_Hamamatsu" SQW-118-2 236.22,0 r270 bottom locked
SIG3 "Con_Hamamatsu" SQW-118-2 -236.22,0 r270 bottom locked
SIG4 "Con_Hamamatsu" SQW-118-2 -708.66,0 r270 bottom locked
SIGX "Header 7" HDR1X7 -300,920 r0 top
SIGY "Header 7" HDR1X7 -300,-920 r0 top
U1 "AD8056AR" RM-8 -682,268 r270 top
U2 "AD8056AR" RM-8 -198.69,271.39 r270 top
U3 "AD8056AR" RM-8 267,263 r270 top
U4 "AD8056AR" RM-8 736,258 r270 top
U5 "AD8056AR" RM-8 738,-143 r90 top
U6 "AD8056AR" RM-8 274,-142 r90 top
U7 "AD8056AR" RM-8 -198,-138 r90 top
U8 "AD8056AR" RM-8 -670,-139 r90 top
U9 "AD8056AR" RM-8 -43,-691 r270 top
U10 "AD8056ARM" RM-8 -732,800 r270 top
U11 "AD8056ARM" RM-8 755,-709 r90 top
U12 "AD8056ARM" RM-8 -722,-706 r90 top
U13 "AD8056ARM" RM-8 721.75,774.75 r270 top

## Footprints (in the part's own frame and the unit in brackets; to place one, negate y for a bottom-side part, rotate by r counter-clockwise, add the part's x,y. Pads: shape width x height; smd on the part's side, far side on the other; paste and mask are expansions set on the pad)
0402 [mm] "Chip Capacitor, Body 1.0x0.5mm, IPC High Density"
  rect 0.6x0.5 smd: 1(-0.5,0) 2(0.5,0)
  body extent -0.55,-0.3 0.55,0.3, height 1.3
1608[0603] [mm] "Chip Capacitor, Body 1.6x0.8mm, IPC High Density"
  rect 0.8x0.9 smd: 1(-0.7,0) 2(0.7,0)
  body extent -0.87,-0.48 0.87,0.48, height 1.3
C0805 [mm] "Chip Capacitor, Body 2.0x1.3mm, IPC High Density"
  rect 1.1x1.4 smd: 1(-0.75,0) 2(0.75,0)
  body extent -1.1,-0.72 1.1,0.72, height 1.4
HDR1X7 [mm] "Connector; Header; 7 Position"
  rect 1.5x1.5 hole 0.9: 1(0,0)
  round 1.5 hole 0.9: 2(2.54,0) 3(5.08,0) 4(7.62,0) 5(10.16,0) 6(12.7,0) 7(15.24,0)
  silkscreen extent -1.27,-1.27 16.51,1.27
RM-8 [mm] "Shrink Small Outline, MSOP; 8 Leads; Body Width 3 mm; Pitch 0.65 mm"
  rect 0.4x1.55 smd: 1(-0.975,-2.075) 2(-0.325,-2.075) 3(0.325,-2.075) 4(0.975,-2.075) 5(0.975,2.075) 6(0.325,2.075) 7(-0.325,2.075) 8(-0.975,2.075)
  silkscreen extent -1.85,-2.2 1.55,0.9
SQW-118-2 [mil]
  rect 40x88 smd mask+2: 1(-669.29,-64.5) 2(-669.29,64.5) 3(-590.55,-64.5) 4(-590.55,64.5) 5(-511.81,-64.5) 6(-511.81,64.5) 7(-433.07,-64.5) 8(-433.07,64.5) 9(-354.33,-64.5) 10(-354.33,64.5) 11(-275.59,-64.5) 12(-275.59,64.5) 13(-196.85,-64.5) 14(-196.85,64.5) 15(-118.11,-64.5) 16(-118.11,64.5) 17(-39.37,-64.5) 18(-39.37,64.5) 19(39.37,-64.5) 20(39.37,64.5) 21(118.11,-64.5) 22(118.11,64.5) 23(196.85,-64.5) 24(196.85,64.5) 25(275.59,-64.5) 26(275.59,64.5) 27(354.33,-64.5) 28(354.33,64.5) 29(433.07,-64.5) 30(433.07,64.5) 31(511.81,-64.5) 32(511.81,64.5) 33(590.55,-64.5) 34(590.55,64.5) 35(669.29,-64.5) 36(669.29,64.5)

## Part data
C1 C2 C3 C4 C5 C6 C7 C8 C9 C10 C11 C12 C13 C14 C15 C16 C19 C20 C21 C22 C23 C24 C25 C26 C27 C28 C29 C30 C31 C32 C33 C34 C35 C36: "Capacitor"
C17 C18: "Polarized Capacitor (Surface Mount)"
R1 R1_0 R1x R1y R2 R2_0 R2x R2y R3 R3_0 R3x R3y R4 R4_0 R4x R4y R5 R5_0 R5x R5y R6 R6_0 R6x R6y R7 R7_0 R7x R7y R8 R8_0 R8x R8y R9 R9_0 R9x R9y R10 R10_0 R10x R10y R11 R11_0 R11x R11y R12 R12_0 R12x R12y R13 R13_0 R13x R13y R14 R14_0 R14x R14y R15 R15_0 R15x R15y R16 R16_0 R16x R16y R17 R17x R17y R18 R18_0 R18x R18y R19 R19x R19y R20 R20_0 R20x R20y R21 R21x R21y R22 R22x R22y R23 R23_0 R23x R23y R24 R24x R24y R25 R25x R25y R26 R26x R26y R27 R27x R27y R28 R28_0 R28x R28y R29 R29x R29y R30 R30x R30y R31 R31x R31y R32 R32x R32y R33 R33x R33y R34 R34_0 R34x R34y R35 R35x R35y R36 R36x R36y R37 R37x R37y R38 R38x R38y R39 R39x R39y R40 R40_0 R40x R40y R41 R41x R41y R42 R42x R42y R43 R43x R43y R44 R44x R44y R45x R45y R46x R46y R47x R47y R48x R48y R49x R49y R50x R50y R51x R51y R52x R52y R53x R53y R54x R54y R55x R55y R56x R56y R57x R57y R58x R58y R59x R59y R60x R60y R61x R61y R62x R62y R63x R63y R64x R64y RDYN RX1A RX1B RX2A RX2B RX3A RX3B RX4A RX4B RX5A RX5B RX6A RX6B RX7A RX7B RX8A RX8B RXA RXB RY1A RY1B RY2A RY2B RY3A RY3B RY4A RY4B RY5A RY5B RY6A RY6B RY7A RY7B RY8A RY8B RYA RYB: "Resistor"
SIGX SIGY: "Header, 7-Pin"
U1 U2 U3 U4 U5 U6 U7 U8 U9 U10 U11 U12 U13: "Low Cost, 300MHz Voltage Feedback Amplifier"

## Via types
v1: diameter 16, hole 8, Top Layer to Bottom Layer, 177 vias

## Nets (pads, with @x,y where several pads share a name; then routed paths per layer and width w, separated by ;. In a path a pad name is that pad's centre, name@x,y a point inside that pad or via, vN(x,y) a via of type N, cw(c..) or ccw(c..) an arc to the next point about the centre after c; other vN are vias at no path point)
+5: C1.2 C2.2 C5.2 C6.2 C9.2 C10.2 C13.2 C14.2 C17.1 C19.2 C21.1 C25.1 C29.1 C33.1 SIGX.3 U1.8 U2.8 U3.8 U4.8 U5.8 U6.8 U7.8 U8.8 U9.8 U10.8 U11.8 U12.8 U13.8 | length 10128.7
  Top Layer w6: v1(-840,-234) -752.53,-234 ; C33.1@-803.78,-828.25 v1(-803.78,-786) -803.78,-744.47 U12.8@-803.69,-744.39 ; U8.8@-751.69,-177.39 -751.53,-177.55 C14.2@-751.53,-261 ; C21.1@-650.47,928 v1(-650.47,881) -650.47,838.55 U10.8@-650.31,838.39 ; C1.2@-600.47,390 -600.47,306.55 U1.8@-600.31,306.39 ; C1.2@-600.47,393 -569,393 v1(-561,401) ; U7.8@-279.69,-176.39 -279.53,-176.55 C13.2@-279.53,-260 ; v1(-279.53,-313.47) C13.2@-279.53,-264 ; C17.1@-129.57,810 -100,839.57 SIGX.3@-100,920 ; C2.2@-119.13,396.39 -117.47,394.73 -117.47,333.47 ; U2.8@-117.31,309.39 -117.47,309.55 -117.47,333.47 ; v1(-75,333) -117,333 -117.47,333.47 ; C19.2@38.53,-578 38.53,-652.45 U9.8@38.69,-652.61 ; v1(132,-316) 179,-269 C10.2@193.44,-269 ; U6.8@192.31,-180.39 192.47,-180.55 C10.2@192.47,-264 ; C5.2@348.53,385 348.53,332 ; U3.8@348.69,301.39 348.53,301.55 348.53,332 ; v1(394,332) 348.53,332 ; U5.8@656.31,-181.39 656.47,-181.55 C9.2@656.47,-265 ; v1@659.47,-315.53 C9.2@659.47,-265 ; C29.1@673.31,-835.83 v1(673.31,-789) U11.8@673.31,-747.39 ; U13.8@803.44,813.13 803.53,813.22 v1(803.53,852) C25.1@803.53,897 ; C6.2@817.53,380 817.53,331 ; U4.8@817.69,296.39 817.53,296.55 817.53,331 ; v1@843,327 v1(843,331) 817.53,331
  Pot_Gnd w10: v1(-803.78,-786) -753,-786 -753,-608 -840,-521 -840,-314 ; v1(-279.53,-313.47) -279.53,-287.53 ; SIGX.3@-100,920 -100,984 ; v1(-75,333) -75,359 ; v1(39,-618) 87,-570 87,-418.47 132,-373.47 v1(132,-316) 160.53,-287.47 191.47,-287.47 ; v1(394,332) 394,352 ; v1(673.31,-789) 703,-789 736,-756 736,-316 v1(659,-316) 630,-287 -515,-287 -542,-314 -840,-314 ; v1(803.53,852) 671.53,984 -100,984 ; v1(843,331) 814,360 -520,360 v1(-561,401) -597,437 -597,498 -699,600 -699,851 -669,881 v1(-650.47,881) -632,881 -529,984 ; -840,-314 v1(-840,-234) -972,-102 -972,836 -824,984 -529,984 ; -529,984 -100,984
-5: C3.2 C4.2 C7.2 C8.2 C11.2 C12.2 C15.2 C16.2 C18.2 C20.2 C24.2 C28.2 C32.2 C36.2 SIGX.5 U1.4 U2.4 U3.4 U4.4 U5.4 U6.4 U7.4 U8.4 U9.4 U10.4 U11.4 U12.4 U13.4 | length 8831.8
  Top Layer w6: v1(-831,158) -777.53,158 C3.2@-766.53,147 ; C24.2@-814.53,660 -813.69,660.83 U10.4@-813.69,761.61 ; U1.4@-763.69,229.61 -763.69,145.16 C3.2@-763.53,145 ; C36.2@-665.72,-589.25 -665.72,-621.78 v1(-656.5,-631) -640.31,-647.2 U12.4@-640.31,-667.61 ; C16.2@-588.47,-16 -588.31,-16.16 -588.31,-66 ; U8.4@-588.31,-100.61 -588.31,-66 ; v1(-557,-66) -588.31,-66 ; v1@-331,156 v1@-330,155 ; v1(-330,157) -312,175 -286,175 ; U2.4@-280.69,232.61 -280.69,148.16 C4.2@-280.53,148 ; U9.4@-124.69,-729.39 -123.53,-730.55 v1(-123.53,-762) C20.2@-123.53,-804 ; C15.2@-116.47,-15 C15.2@-116.31,-15.16 ; U7.4@-116.31,-99.61 C15.2@-116.31,-15.16 ; v1(-73,12) -89.14,12 C15.2@-116.31,-15.16 ; SIGX.5@100,920 100,839.57 C18.2@128.57,811 ; v1(131,157) 144,170 185.31,170 ; U3.4@185.31,224.61 185.31,170 ; C7.2@185.47,140 185.31,140.16 185.31,170 ; C12.2@355.53,-19 355.69,-19.16 U6.4@355.69,-103.61 ; C12.2@360.53,-18 360.53,-17.47 v1(391,13) ; v1(589,633) 640.47,633 665.47,658 665.47,690.53 640.06,715.94 U13.4@640.06,736.36 ; v1(610,156) 654.31,156 ; U4.4@654.31,219.61 654.31,156 ; C8.2@654.47,135 654.31,135.16 654.31,156 ; C11.2@819.53,-20 819.69,-20.16 U5.4@819.69,-104.61 ; C11.2@822.53,-20 822.53,1.53 835,14 v1(835,10) ; U11.4@836.69,-670.61 836.69,-618.17 816.53,-598 v1(872,-598)
  Pot_Gnd w10: v1(-815,724) -931,608 -931,258 v1(-831,158) -831,87 -812,68 -605,68 -542,5 ; v1(-656.5,-631) -387,-631 -299.5,-718.5 -242.5,-718.5 -199,-762 v1(-123.53,-762) -66.53,-819 954,-819 954,-598 v1(872,-598) 769,-495 769,-58 v1@836,9 ; v1(-557,-66) -557,-10 -542,5 ; v1(-330,157) -330,123 ; SIGX.5@100,920 100,784 227,657 565,657 v1(589,633) 787,435 837,435 899,373 899,71 v1@836.5,8.5 ; v1(131,157) 131,97 ; v1(610,156) 610,106 ; v1(835,10) 833,8 795,8 707,96 620,96 610,106 ; -542,5 -523,24 -460,24 -361,123 -330,123 ; -330,123 -308,101 -162,101 v1(-73,12) -43,42 76,42 131,97 ; 131,97 181,47 357,47 v1(391,13) 476,13 569,106 610,106
GND: C1.1 C2.1 C3.1 C4.1 C5.1 C6.1 C7.1 C8.1 C9.1 C10.1 C11.1 C12.1 C13.1 C14.1 C15.1 C16.1 C17.2 C18.1 C19.1 C20.1 C21.2 C23.2 C24.1 C25.2 C27.2 C28.1 C29.2 C31.2 C32.1 C33.2 C35.2 C36.1 R1_0.2 R2_0.1 R3_0.1 R4_0.1 R5_0.1 R6_0.1 R7_0.1 R8_0.1 R9_0.1 R10_0.1 R11_0.1 R12_0.1 R13_0.1 R14_0.1 R15_0.1 R16_0.1 R18_0.1 R20_0.1 R21.2 R23_0.2 R27.2 R28_0.2 R33.2 R34_0.2 R39.2 R40_0.2 SIG1.2 SIG1.4 SIG1.6 SIG1.8 SIG1.10 SIG1.12 SIG1.14 SIG1.16 SIG1.18 SIG1.20 SIG1.22 SIG1.24 SIG1.26 SIG1.28 SIG1.30 SIG1.32 SIG1.34 SIG1.35 SIG1.36 SIG2.2 SIG2.4 SIG2.6 SIG2.8 SIG2.10 SIG2.12 SIG2.14 SIG2.16 SIG2.18 SIG2.20 SIG2.22 SIG2.24 SIG2.26 SIG2.28 SIG2.30 SIG2.32 SIG2.33 SIG2.35 SIG2.36 SIG3.2 SIG3.4 SIG3.6 SIG3.8 SIG3.10 SIG3.12 SIG3.14 SIG3.16 SIG3.18 SIG3.20 SIG3.22 SIG3.24 SIG3.26 SIG3.28 SIG3.30 SIG3.32 SIG3.33 SIG3.34 SIG3.36 SIG4.2 SIG4.4 SIG4.6 SIG4.8 SIG4.10 SIG4.12 SIG4.14 SIG4.16 SIG4.18 SIG4.20 SIG4.22 SIG4.24 SIG4.26 SIG4.28 SIG4.30 SIG4.32 SIG4.34 SIG4.35 SIG4.36 SIGX.2 SIGX.4 SIGX.6 SIGY.2 SIGY.3 SIGY.5 SIGY.6 | length 17902.5
  Top Layer w6: R40_0.2@-913.25,-612.57 R40_0.2@-913,-612.31 -889.46,-588.78 C36.1@-725.25,-588.78 ; R23_0.2@-895,730.31 -895,640 -862,607 -759.47,607 -759.47,661 -730,690.47 ; R1_0.2@-856,197.31 -856,99 -836,79 -720,79 ; R16_0.1@-847,-38.32 -773.32,-38.32 -749,-14 -720,-14 ; C33.2@-744.72,-828.25 -725.25,-808.78 v1(-725.25,-732) C36.1@-725.25,-588.78 ; C21.2@-709.53,928 -709.53,922.47 -730,902 -730,690.47 ; -704.78,94.14 -704.78,94.22 ; -704.47,94.53 -704.78,94.22 ; C3.1@-704.47,143 -603,143 -578.68,167.32 R2_0.1@-505,167.32 ; C14.1@-692.47,-261 -666,-234.53 -666,-41.77 ; -686.31,170.77 -704.78,152.3 -704.78,94.22 ; -686,170.77 -686,363.53 C1.1@-659.53,390 ; -665.69,-41.77 -647.22,-23.3 -647.22,34.78 ; C16.1@-647.53,-14 -720,-14 ; -647.53,34.47 -647.22,34.78 ; -647.22,34.86 -647.22,34.78 ; R15_0.1@-496,-68.31 -496,30 -516,50 -632,50 -647.22,34.78 ; R21.2@-488,725.47 -527,686.47 -726,686.47 -730,690.47 ; R39.2@-468.25,-637.72 -468.25,-615.25 -472.78,-610.72 -535.25,-610.72 -535.25,-560.25 -570.25,-525.25 -725.25,-525.25 C36.1@-725.25,-588.78 ; R14_0.1@-375,-37.32 -301.32,-37.32 -277,-13 C15.1@-175.53,-13 ; R3_0.1@-373,200.31 -373,102 -350,79 v1(-301,79) -240,79 -237,82 ; -237,-11.31 -237,82 ; C4.1@-221.16,146.39 -119.69,146.39 -95.38,170.7 R4_0.1@-21.69,170.7 ; R18_0.1@-221,-742.68 -221,-842 -208,-855 -79,-855 -64.47,-840.47 -64.47,-804 -42,-781.53 ; C13.1@-220.47,-260 -194,-233.53 -194,-40.77 ; C17.2@-200,810.43 SIGX.2@-200,920 ; -193.69,-40.77 -175.22,-22.3 -175.22,35.78 ; C2.1@-178.69,395.39 -178.69,390.84 -203,366.53 -203,174.16 -221.47,155.69 -221.47,97.53 -237,82 ; -175.53,35.47 -175.22,35.78 ; -175.22,35.86 -175.22,35.78 ; R13_0.1@-24,-67.31 -24,31 -44,51 -160,51 -175.22,35.78 ; C19.1@-20.53,-578 -20.53,-581.53 -42,-603 v1(-42,-701) -42,-781.53 ; R5_0.1@93,192.32 93,94 113,74 229,74 ; R12_0.1@97,-41.32 170.68,-41.32 195,-17 233,-17 ; R20_0.1@123,-767.68 109.16,-781.53 -42,-781.53 ; C18.1@200,811.57 SIGX.6@200,920 ; 244.22,89.14 244.22,89.22 ; 244.53,89.53 244.22,89.22 ; C7.1@244.53,138 346,138 370.32,162.32 R6_0.1@444,162.32 ; C10.1@251.53,-264 278,-237.53 278,-44.77 ; 262.69,165.77 244.22,147.3 244.22,89.22 ; 263,165.77 263,358.53 C5.1@289.47,385 ; 278.31,-44.77 296.78,-26.3 296.78,31.78 ; C12.1@296.47,-17 233,-17 ; 296.47,31.47 296.78,31.78 ; 296.78,31.86 296.78,31.78 ; R11_0.1@448,-71.31 448,27 428,47 312,47 296.78,31.78 ; R27.2@468,706.47 468,684 472.53,679.47 535,679.47 535,629 570,594 725,594 C28.1@725,657.53 ; R33.2@511,-634.47 550,-595.47 749,-595.47 C32.1@753,-599.47 ; R10_0.1@561,-42.32 634.68,-42.32 659,-18 705,-18 ; R7_0.1@562,187.32 562,89 582,69 704,69 ; 713.22,84.14 713.22,84.22 ; 713.53,84.53 713.22,84.22 ; C8.1@713.53,133 815,133 839.32,157.32 R8_0.1@913,157.32 ; C9.1@715.53,-265 742,-238.53 742,-45.77 ; 731.69,160.77 713.22,142.3 713.22,84.22 ; 732,160.77 732,353.53 C6.1@758.47,380 ; C29.2@732.53,-837 732.53,-831.47 758,-806 758,-604.47 C32.1@753,-599.47 ; 742.31,-45.77 760.78,-27.3 760.78,30.78 ; C25.2@744.47,897 725,877.53 v1(725,771) C28.1@725,657.53 ; C11.1@760.47,-18 705,-18 ; 760.47,30.47 760.78,30.78 ; 760.78,30.86 760.78,30.78 ; R9_0.1@912,-72.31 912,26 892,46 776,46 760.78,30.78 ; R28_0.2@913,681.31 889.21,657.53 C28.1@725,657.53 ; R34_0.2@918,-639.31 918,-549 907,-538 759,-538 759,-593.47 C32.1@753,-599.47 ; -720,-14 v1(-720,3) -720,79 ; -720,79 -704.78,94.22 ; 233,-17 v1(233,8) 233,78 244.22,89.22 ; 705,-18 v1(705,2) 705,76 713.22,84.22
  Bottom Layer w10: v1(-880,549) -773.16,549 ; v1(-855,-620) -846,-629 -773.16,-629 ; SIG4.2@-773.16,669.29 -773.16,549 ; v1(-720,3) -773.16,3 ; SIG4.35@-644.16,-669.29 SIG4.36@-773.16,-669.29 -773.16,-629 ; v1(-376,639) -367,630 -300.72,630 ; SIG3.36@-300.72,-669.29 SIG3.34@-300.72,-590.55 ; SIG3.2@-300.72,669.29 -300.72,630 ; v1(-85.45,-590.55) SIG3.34@-300.72,-590.55 ; v1(105,630) 105.08,629.92 171.72,629.92 ; v1(106,3) 171.72,3 ; SIG2.36@171.72,-669.29 SIG2.35@300.72,-669.29 300.72,-630 ; SIG2.2@171.72,669.29 171.72,629.92 ; v1(390,-630) 300.72,-630 ; v1(490,-583) 520,-553 644.16,-553 ; v1(571,539) 584,552 644.16,552 ; SIG1.2@644.16,669.29 644.16,552 ; 645.16,1 704,1 v1(705,2) ; SIG1.35@773.16,-669.29 SIG1.36@644.16,-669.29 644.16,-553 ; -773.16,-629 SIG4.30@-773.16,-433.07 SIG4.28@-773.16,-354.33 SIG4.22@-773.16,-118.11 -773.16,3 ; -773.16,3 SIG4.10@-773.16,354.33 -773.16,549 ; SIG3.34@-300.72,-590.55 SIG3.30@-300.72,-433.07 SIG3.24@-300.72,-196.85 SIG3.8@-300.72,433.07 SIG3.4@-300.72,590.55 -300.72,630 ; 171.72,3 SIG2.16@171.72,118.11 SIG2.4@171.72,590.55 171.72,629.92 ; 171.72,3 SIG2.20@171.72,-39.37 SIG2.26@171.72,-275.59 SIG2.32@171.72,-511.81 209.91,-550 218,-550 258.55,-590.55 SIG2.33@300.72,-590.55 300.72,-630 ; 644.16,-553 SIG1.30@644.16,-433.07 SIG1.28@644.16,-354.33 625,-335.17 625,-312 646,-291 646,-198.69 SIG1.24@644.16,-196.85 SIG1.12@644.16,275.59 SIG1.8@644.16,433.07 644.16,552
  other v1: 757,-729 -731,787
NetC22_1: C22.1 R25.1 R26.2 | length 114.4
  Top Layer w6: C22.1@-490,835.47 -488.53,834 -418.68,834 -418.68,792 R26.2@-419,791.69
NetC22_2: C22.2 R24.1 RXA.2 U10.7 | length 257.8
  Top Layer w6: U10.7@-650.31,812.8 -602.2,812.8 -586.32,828.68 R24.1@-556,828.68 -556,862 -523.47,894.53 -490,894.53 RXA.2@-490,938.68
NetC23_1: C23.1 R26.1 U10.5 | length 241.6
  Top Layer w6: U10.5@-650.31,761.61 -601.61,761.61 -585.53,745.53 -526.47,745.53 -517.68,754.32 R26.1@-419,754.32
NetC26_1: C26.1 R31.1 R32.2 | length 156.2
  Top Layer w6: R31.1@348.68,779 385.68,779 385.68,809.68 402,826 C26.1@467.47,826
NetC26_2: C26.2 R30.1 RXB.2 U13.1 | length 277.2
  Top Layer w6: RXB.2@467.69,934 RXB.2@467.69,927 467.69,884.84 468,884.53 522.47,884.53 535,872 R30.1@535,827.68 567.32,827.68 581.87,813.13 U13.1@640.06,813.13
NetC27_1: C27.1 R32.1 U13.3 | length 263
  Top Layer w6: R32.1@386,739.32 C27.1@534.21,739.32 ; C27.1@535,738.53 565.53,738.53 588.95,761.95 U13.3@640.06,761.95
NetC30_1: C30.1 R37.1 R38.2 | length 114.4
  Top Layer w6: R38.2@442,-700.69 441.68,-701 441.68,-743 511.53,-743 C30.1@513,-744.47
NetC30_2: C30.2 R36.1 RYA.2 U11.7 | length 327.8
  Top Layer w6: RYA.2@513,-917.68 513,-803.53 546.47,-803.53 579,-771 R36.1@579,-737.68 609.32,-737.68 625.2,-721.8 U11.7@673.31,-721.8
NetC31_1: C31.1 R38.1 U11.5 | length 245.5
  Top Layer w6: R38.1@442,-661.32 447.69,-667 536,-667 548.47,-654.53 608.53,-654.53 624.61,-670.61 U11.5@673.31,-670.61
NetC34_1: C34.1 R43.1 R44.2 | length 128.8
  Top Layer w6: C34.1@-467.72,-757.25 -385.94,-757.25 R44.2@-385.94,-710.25
NetC34_2: C34.2 R42.1 RYB.2 U12.1 | length 328.7
  Top Layer w6: U12.1@-640.31,-744.39 -582.12,-744.39 -567.57,-758.94 -535.25,-758.94 -535.25,-803.25 -522.72,-815.78 C34.2@-468.25,-815.78 ; RYB.2@-468,-917.69 C34.2@-468,-816.53
NetC35_1: C35.1 R44.1 U12.3 | length 263
  Top Layer w6: U12.3@-640.31,-693.2 -589.2,-693.2 -565.78,-669.78 C35.1@-535.25,-669.78 ; C35.1@-534.46,-667.57 R44.1@-386.25,-667.57
NetR1_0_1: R1_0.1 U1.3 | length 100
  Top Layer w6: R1_0.1@-856,236.68 -846.32,236.68 -827.8,255.2 U1.3@-763.69,255.2
NetR1_1: R1.1 R1x.1 R2x.1 R3x.1 R4x.1 R5x.1 R6x.1 R7x.1 R8x.1 U1.2 | length 2802.4
  Top Layer w6: v1(-895.11,281.31) R1.1@-856,281.31 -764.21,281.31 U1.2@-763.69,280.8
  X w6: v1(-895.11,281.31) -895.11,321.89 -845,372 -845,503 -643,705 v1(-445,705) ; v1(-445,626.61) v1(-445,705) ; v1(29,626.61) v1(29,705) ; v1(502,626.61) v1(502,705) ; v1(950,626.61) v1(950,705) v1(502,705) ; v1(-445,705) v1(29,705) ; v1(29,705) v1(502,705)
  Bottom Layer w6: R8x.1@-475.31,626.61 v1@-446.61,626.61 ; R7x.1@-475.31,705 v1(-445,705) ; R6x.1@-1.31,626.61 v1@27.39,626.61 ; R5x.1@-1.31,705 v1(29,705) ; R4x.1@471.69,626.61 v1@500.39,626.61 ; R3x.1@471.69,705 v1(502,705) ; R2x.1@919.68,626.61 v1@948.39,626.61 ; R1x.1@919.68,705 v1(950,705)
NetR1_2: R1.2 RX1A.2 RX1B.2 U1.1 | length 372
  Top Layer w6: U1.1@-763.69,306.39 -827.39,306.39 -841.69,320.69 R1.2@-856,320.69 -856,423 -792.69,486.31 RX1A.2@-764,486.31 RX1B.2@-710.8,486.31
NetR1x_2: R1x.2 R1y.1 SIG1.1 | length 140.8
  Bottom Layer w6: SIG1.1@773.16,669.29 876.83,669.29 880.31,672.78 R1x.2@880.31,705
NetR1y_2: R1y.2 R9.1 R9y.1 R17y.1 R25y.1 R33y.1 R41y.1 R49y.1 R57y.1 U5.2 | length 1833.7
  Top Layer w6: U5.2@819.69,-155.8 820.21,-156.31 R9.1@912,-156.31 ; R9.1@917.31,-156.31 R9.1@914,-156.31 951.31,-119 v1(989,-119)
  Bottom Layer w6: R57y.1@919.69,-431.61 987.39,-431.61 989.2,-429.8 989.2,38.52 ; R49y.1@919.69,-274.84 920.46,-274.07 987.93,-274.07 ; R41y.1@919.69,-118.07 v1@987.93,-118.07 ; R33y.1@919.69,38.71 919.87,38.52 989.2,38.52 ; R25y.1@919.69,195.48 986.48,195.48 ; R17y.1@919.69,352.26 988.26,352.26 ; R9y.1@919.69,509.03 921.46,510.8 989.2,510.8 ; R1y.2@919.68,665.8 989.2,665.8 989.2,510.8 ; 989.2,38.52 989.2,510.8
NetR2_0_2: R2_0.2 U1.5 | length 104.9
  Top Layer w6: U1.5@-600.24,229.69 U1.5@-600.31,229.61 -545.61,229.61 -522.69,206.69 R2_0.2@-505,206.69
NetR2_1: R2.1 R9x.1 R10x.1 R11x.1 R12x.1 R13x.1 R14x.1 R15x.1 R16x.1 U1.6 | length 2725.3
  Top Layer w6: U1.6@-600.31,255.2 -600.2,255.31 R2.1@-505,255.31 -466,216.31 -466,134 -513,87 v1@-550.93,87
  X w6: v1(-554,87) -554,363 v1@-445,472 ; v1(-445,548) v1@-445,472 ; v1@23,548 v1(29,548) v1(29,470) ; v1(502,470) v1(502,548) ; v1(950,548) v1(950,470) v1(-445,470) v1@-445,472
  Bottom Layer w6: R16x.1@-475.31,470 v1(-445,470) ; R15x.1@-475.31,548 v1(-445,548) ; R13x.1@-3,548 v1(29,548) ; R14x.1@-2,470 -1.31,470 v1(29,470) ; R12x.1@471.68,470 v1(502,470) ; R11x.1@471.68,548 v1(502,548) ; R10x.1@919.68,470 v1(950,470) ; R9x.1@919.68,548 v1(950,548)
NetR2_2: R2.2 RX2A.2 RX2B.2 U1.7 | length 402.7
  Top Layer w6: RX2B.2@-658,486.31 RX2A.2@-604,486.31 -578.31,486.31 -505,413 R2.2@-505,294.69 -525.31,294.69 -539.2,280.8 U1.7@-600.31,280.8
NetR2x_2: R2x.2 R2y.2 SIG1.3 | length 141.4
  Bottom Layer w6: SIG1.3@773.16,590.55 877.18,590.55 880.31,593.69 R2x.2@880.31,626.61